# Altium PCB PCB_V1.PcbDoc (part 1 of 3)
Units mil, origin at the board's own origin, x right, y up, seen from the top; angles counter-clockwise.
Board outline 2382 x 2362.37 mil, 4 copper layers (L1, L2, L3, L4), stack 59.054 mil thick; 159 components, 117 nets, 497 pads, 313 vias.
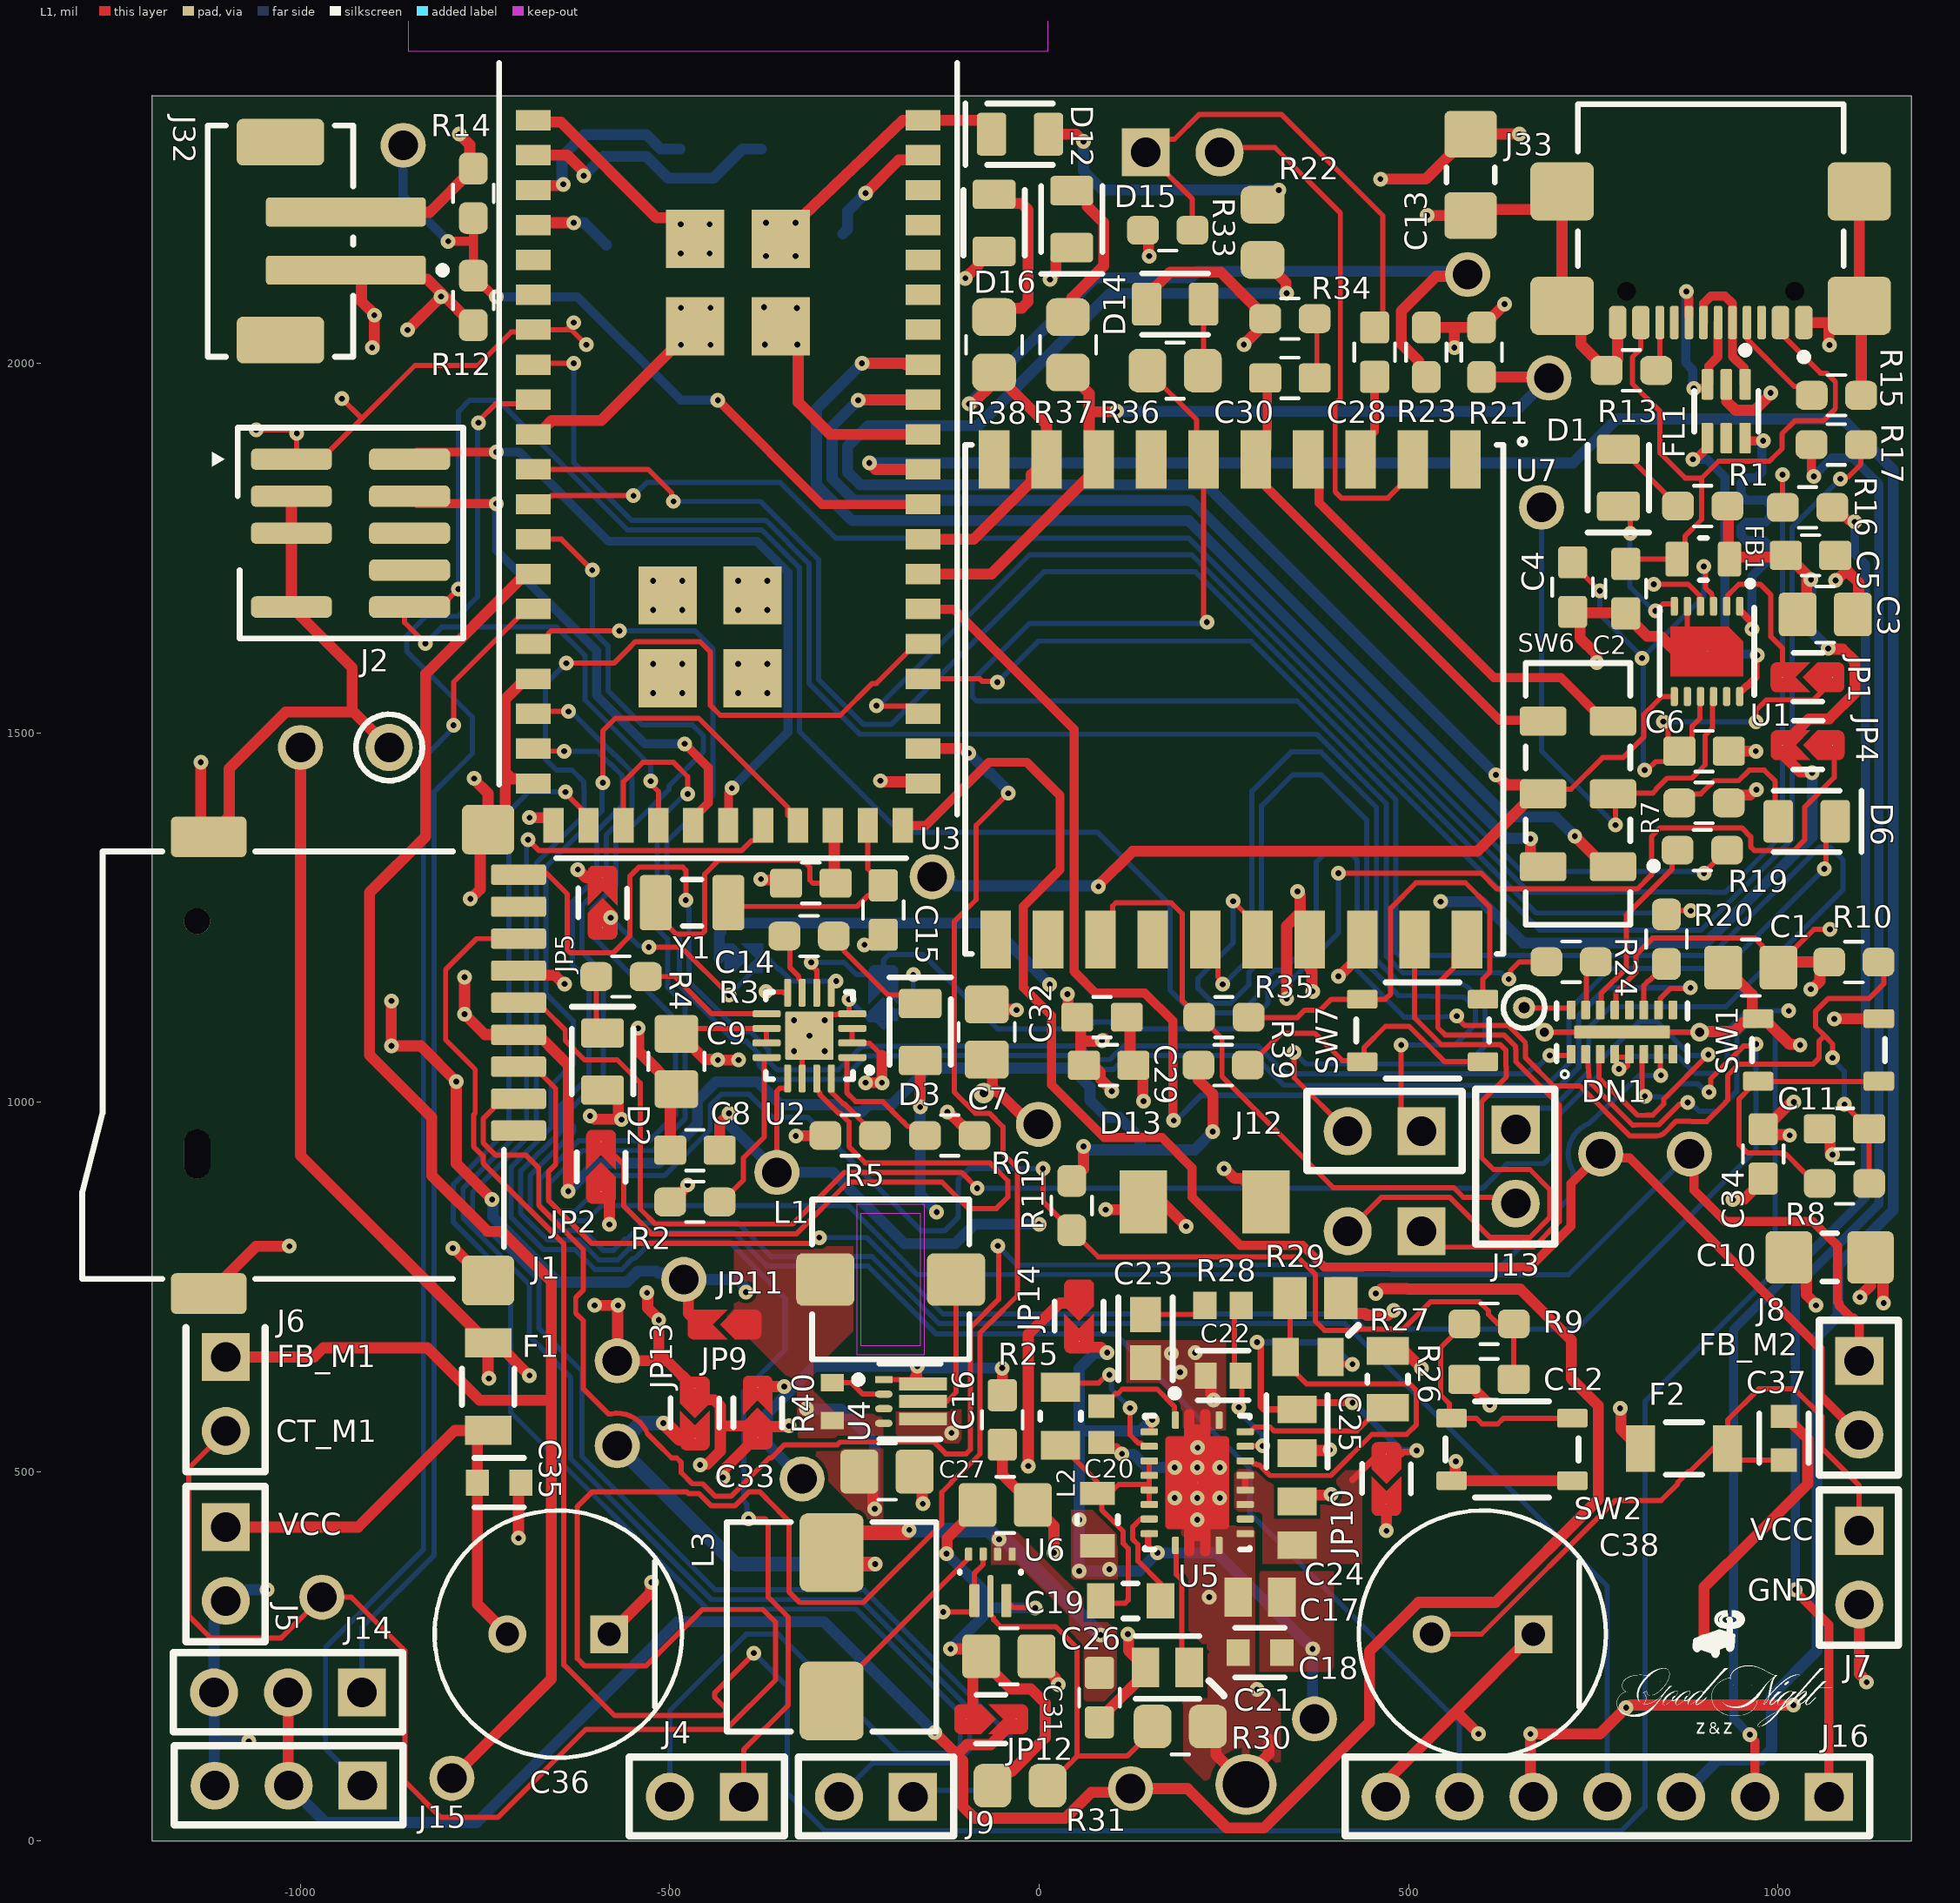
[diagram p0: L1 view]
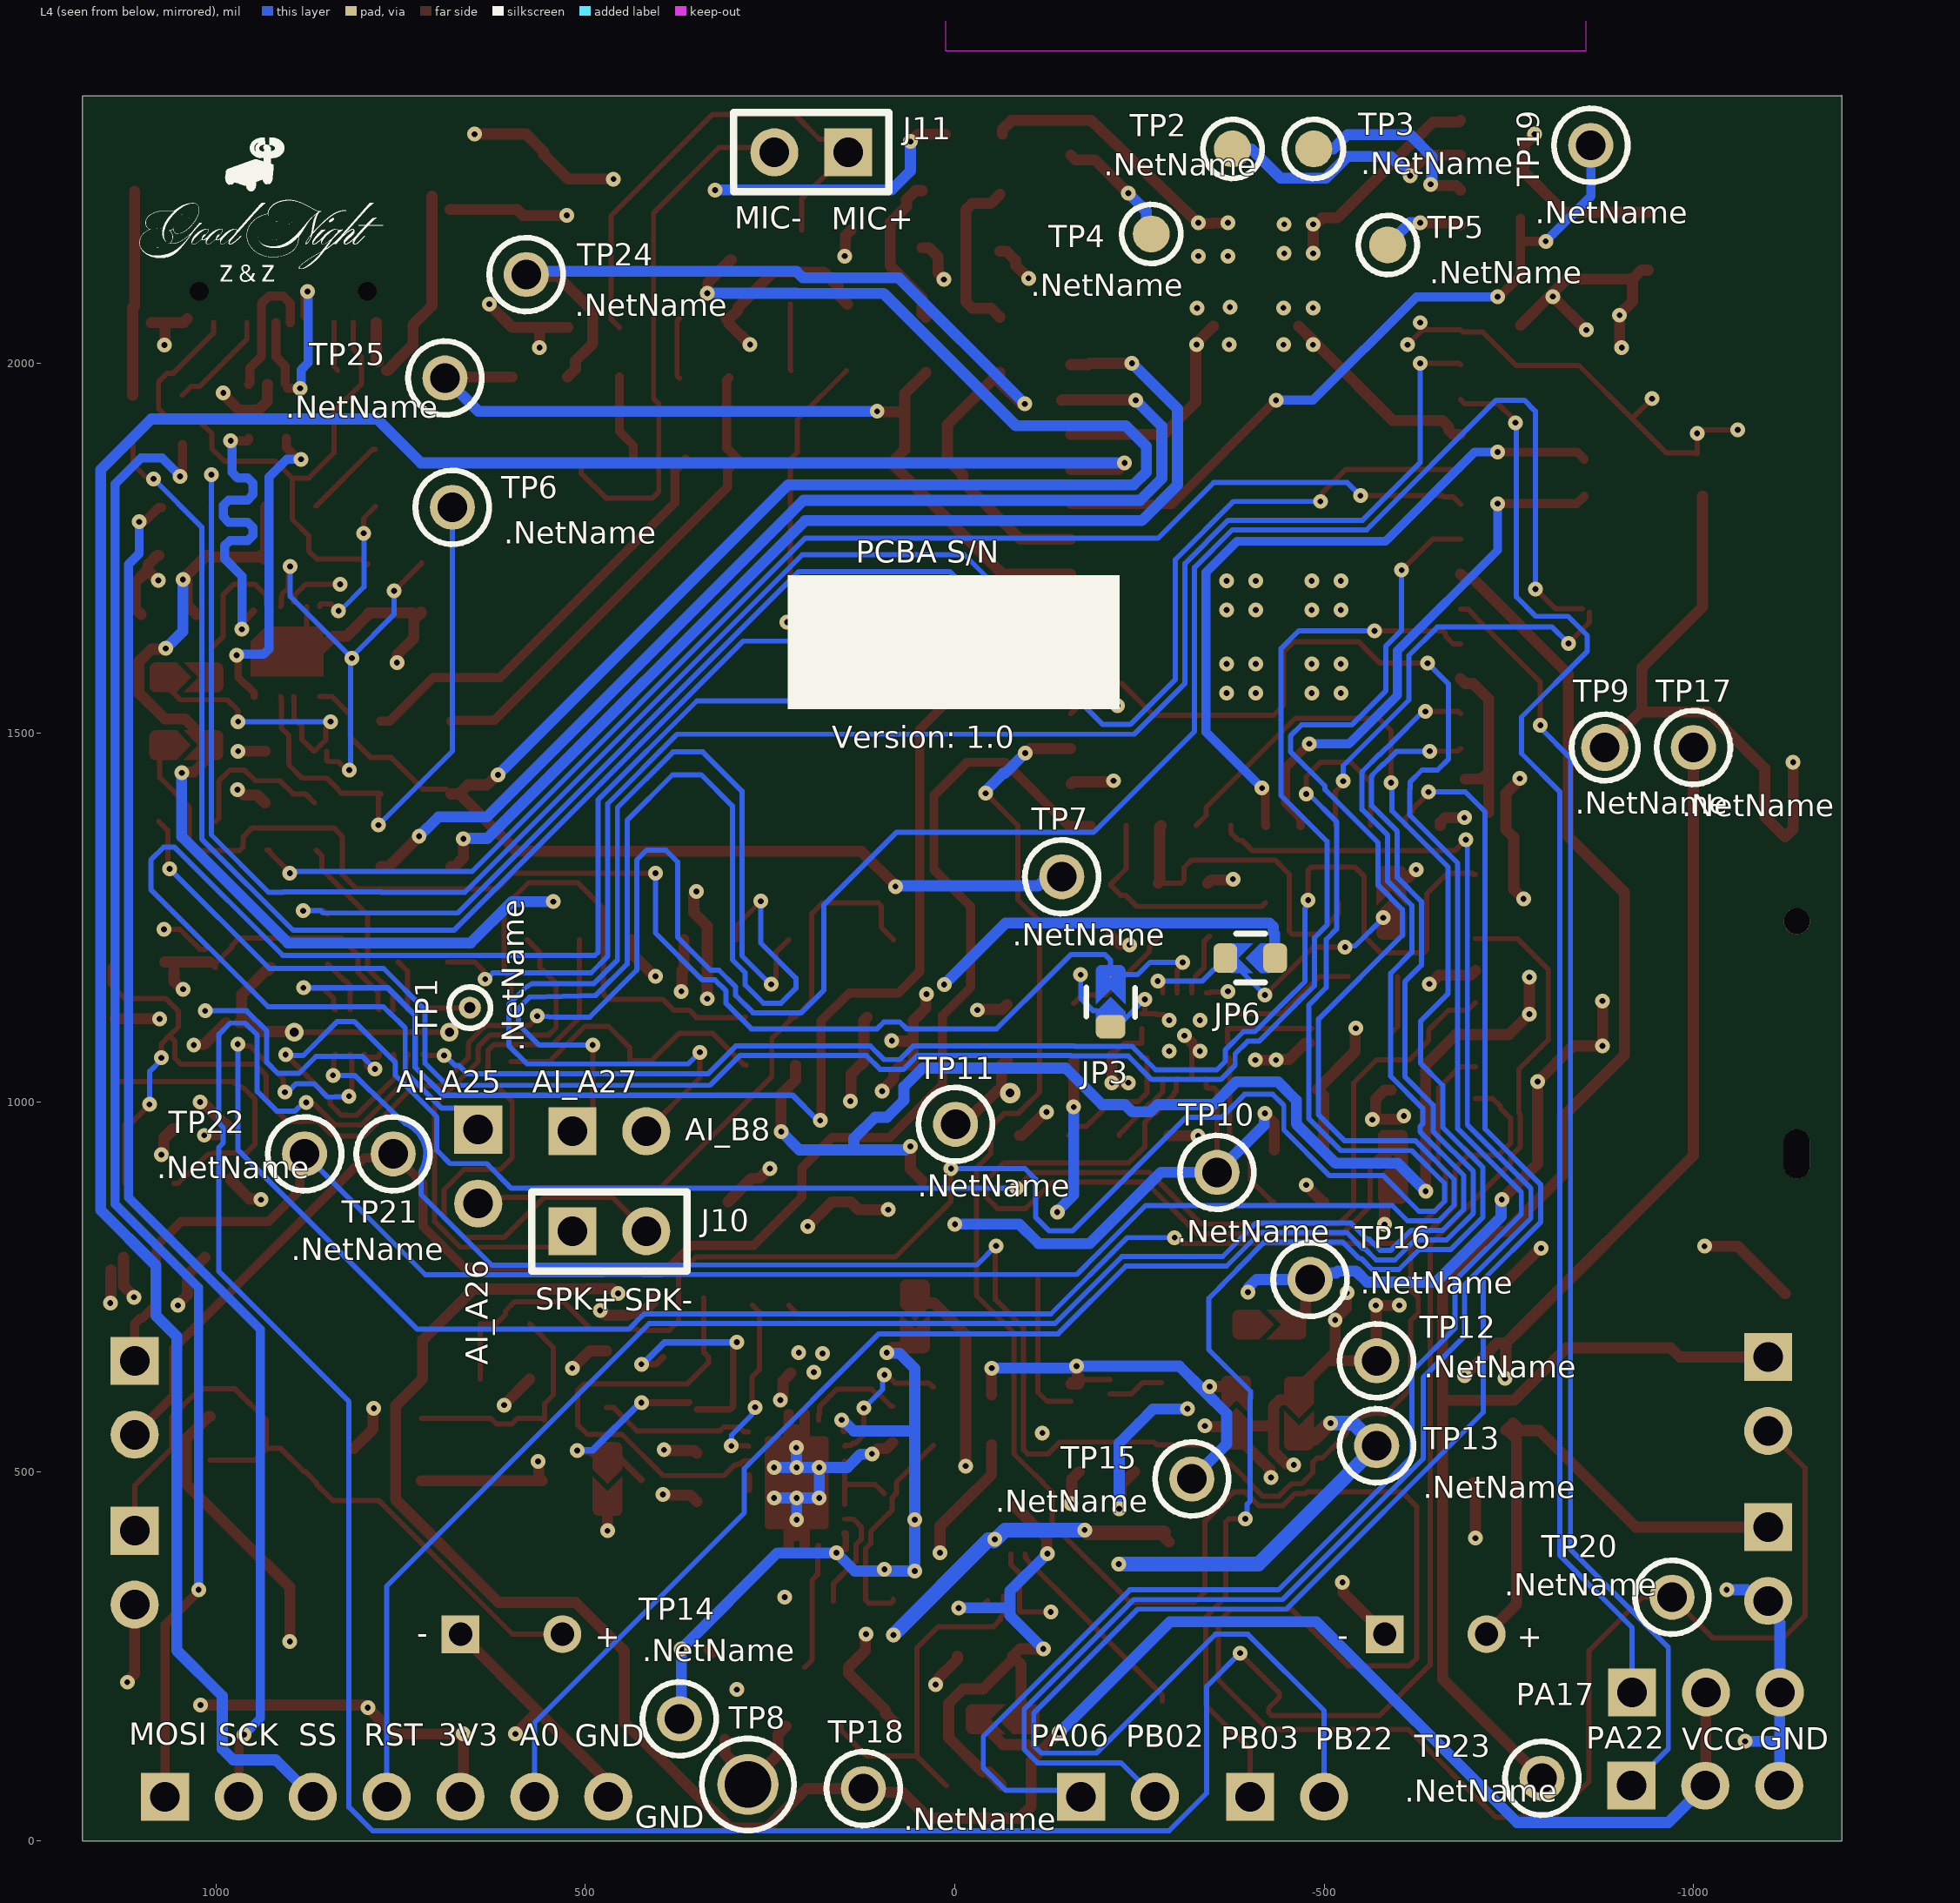
[diagram p1: L4 view, seen from below]
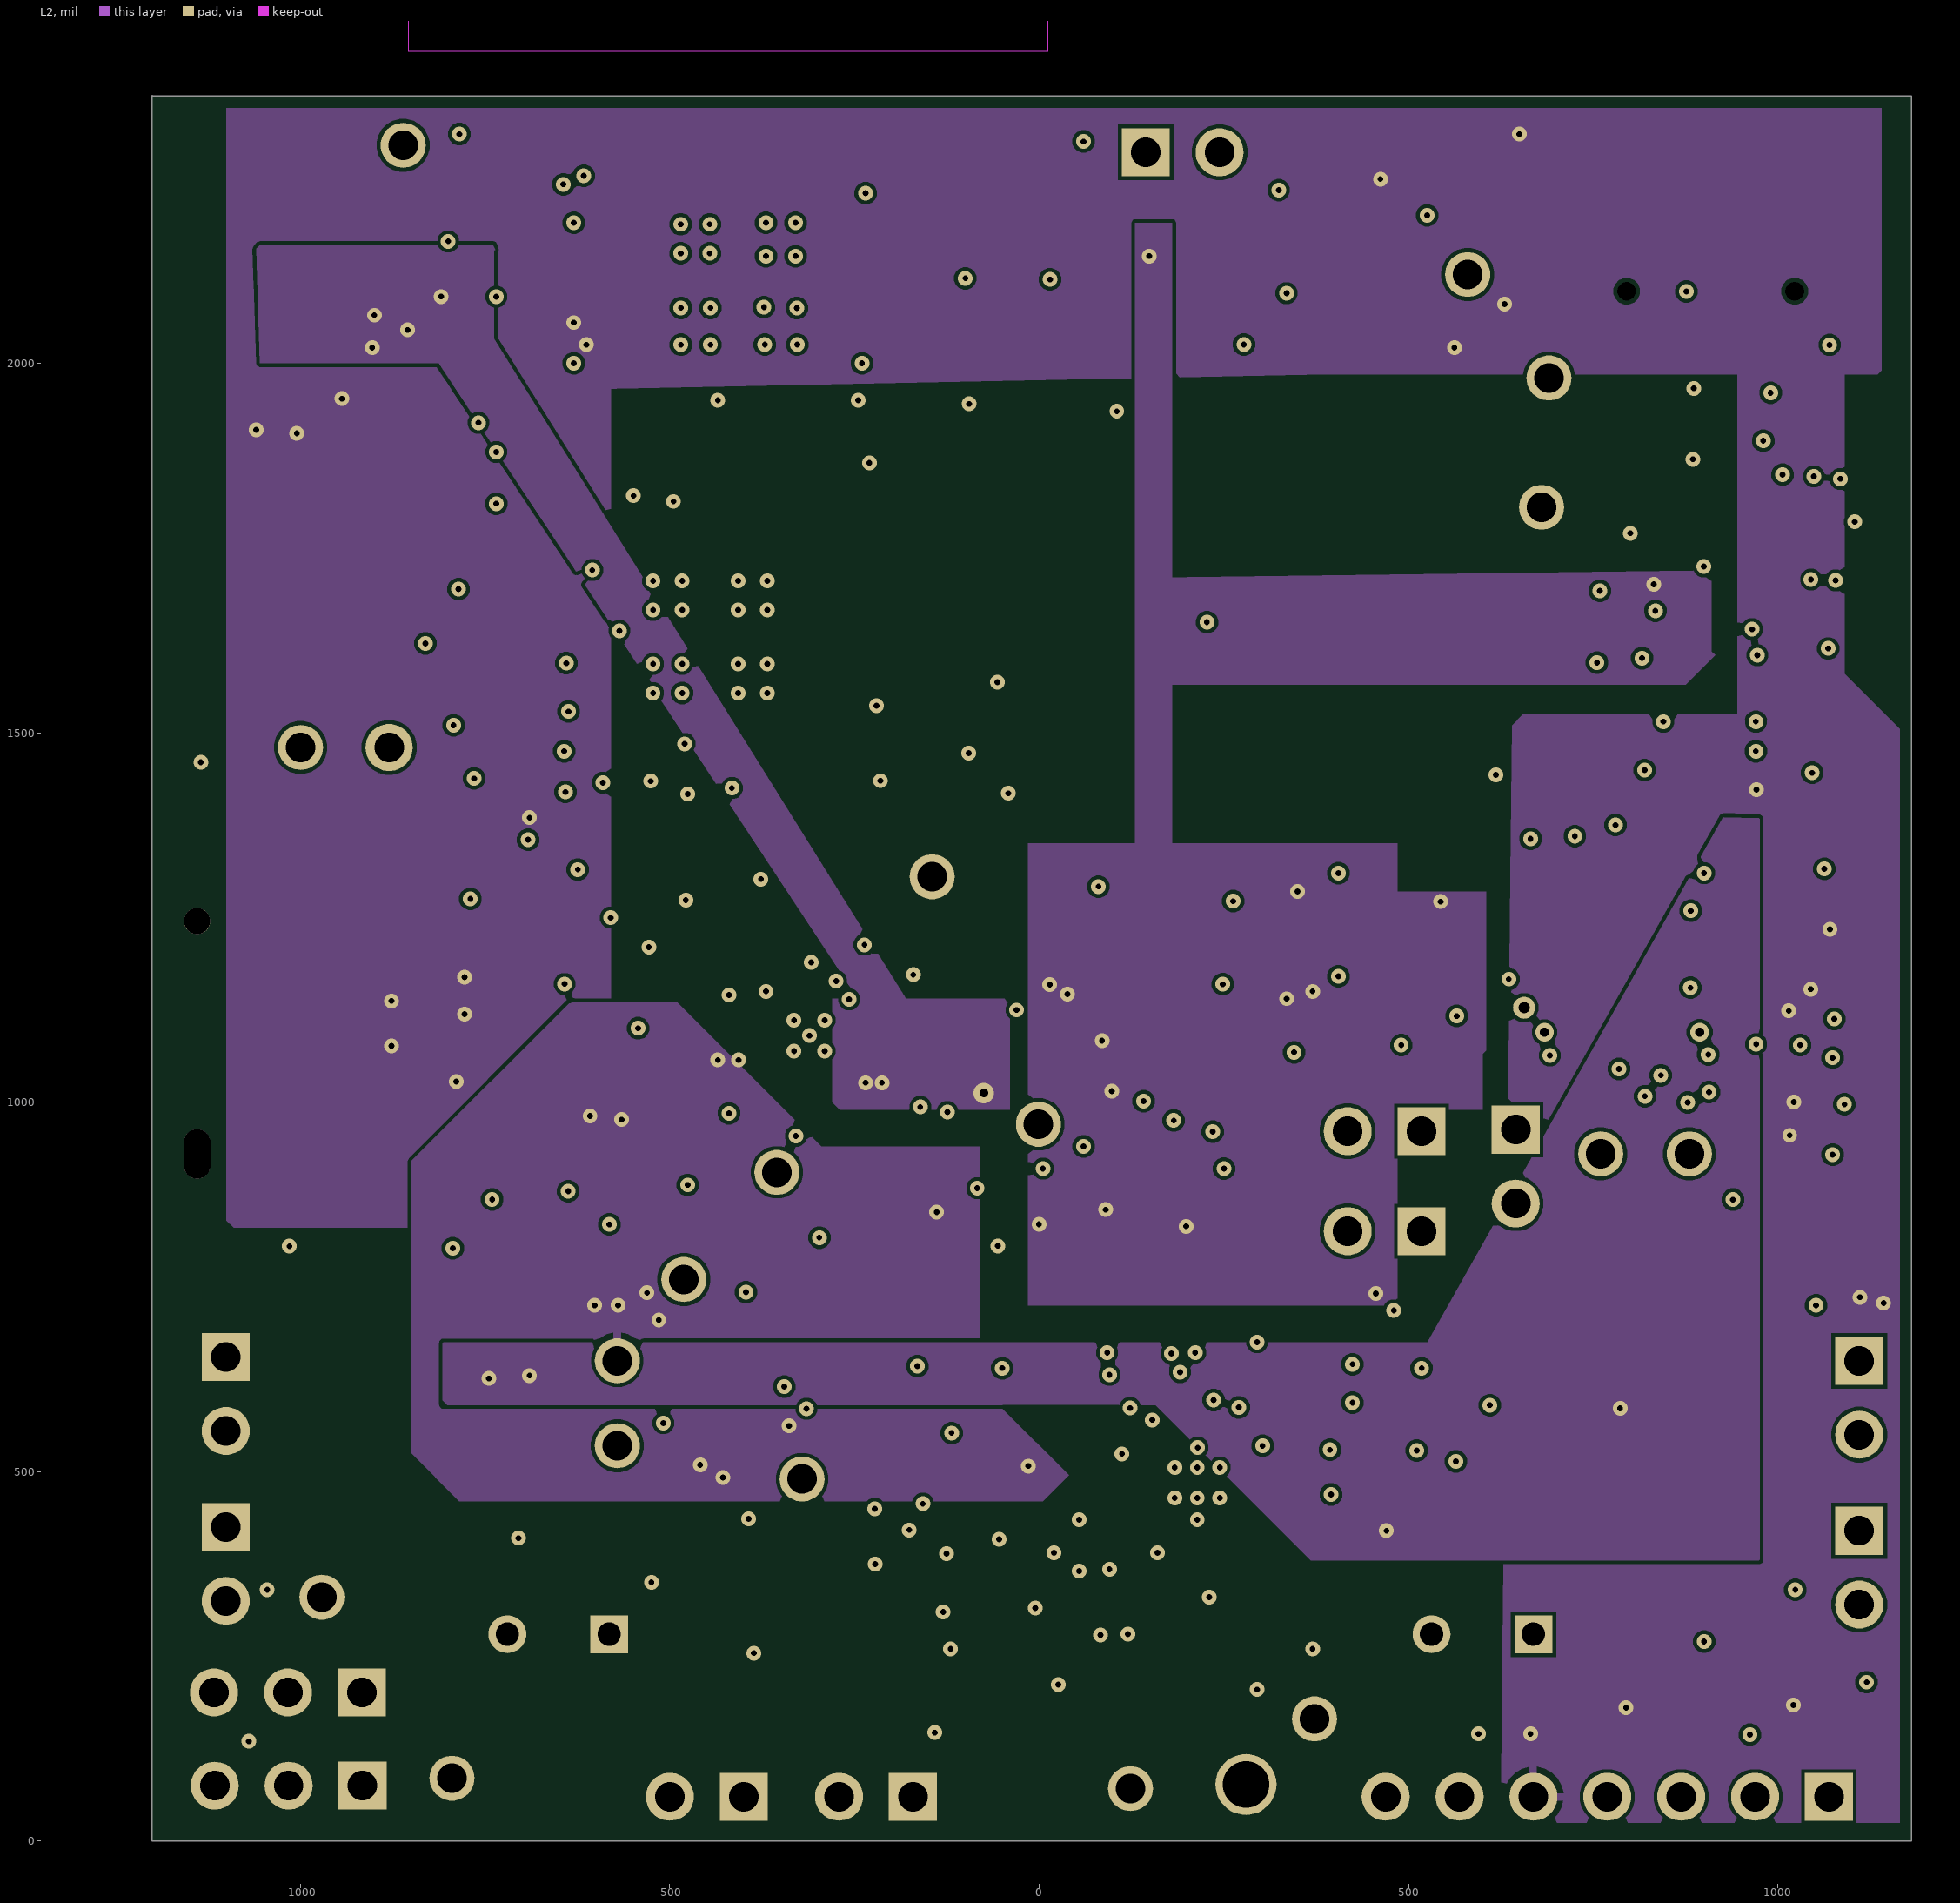
[diagram p2: L2]
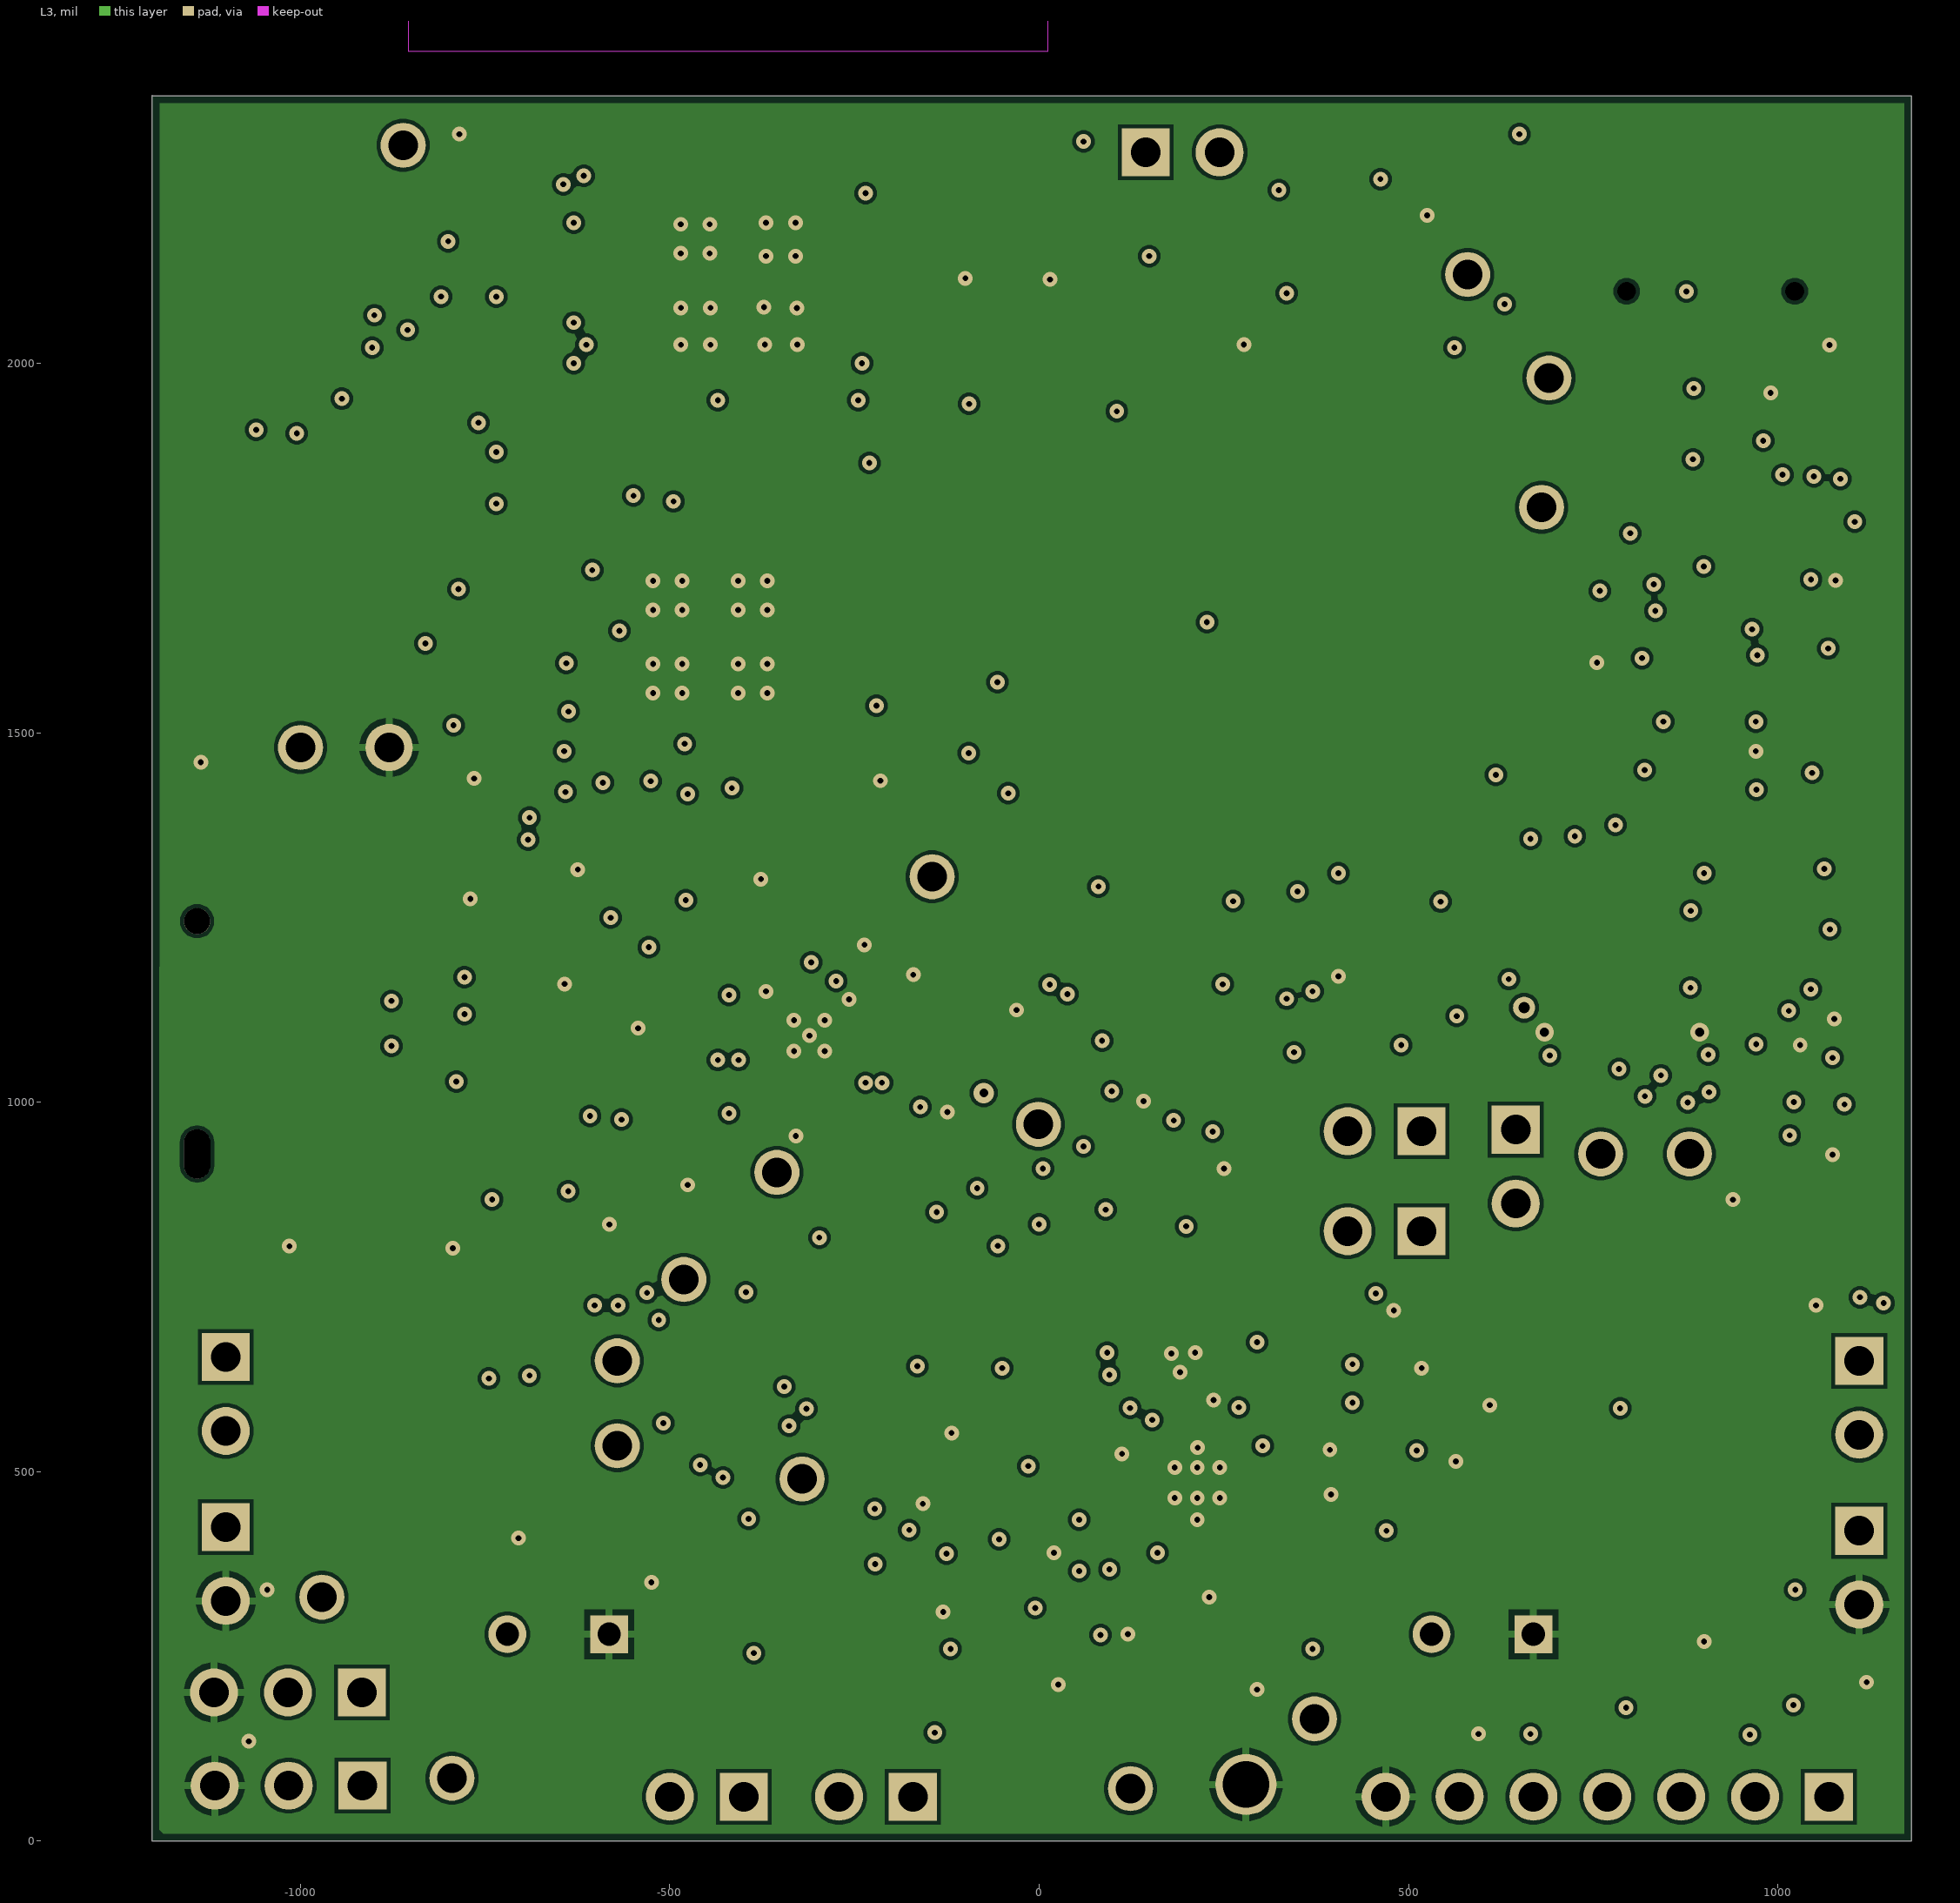
[diagram p3: L3]

## Layer stack, top to bottom
Top Solder: solder mask 1, PSR-4000BN DI Colors, Dk 3.9
L1: signal copper 1.378
Dielectric 1: core 7.96, FR408HR 2113, Dk 3.61
L2: signal copper 0.689
Core: dielectric 39, FR408HR, Dk 3.61
L3: signal copper 0.689
Dielectric 2: core 7.96, FR408HR 2113, Dk 3.61
L4: signal copper 1.378
Board Layer Stack Bottom Solder: solder mask 1, PSR-4000BN DI Colors, Dk 3.9

## Board outline
-1201,0 -1201,2362.37 -1200.63,2362 1181,2362 1181,0

## Design rules (kind name [scope] priority, off if disabled: settings)
AcuteAngle [All] p1: minimum=6.00000000000000E+0001 checktracksonly=TRUE
AssemblyTestPointUsage [All] p1 off: allowmultiple=TRUE
AssemblyTestpoint [All] p1 off: testpointundercomponent=TRUE minsize=30 maxsize=100 preferedsize=60 minholesize=0 maxholesize=40 preferedholesize=32 testpointgrid=1 usegrid=FALSE gridtolerance=0.01 allowsidebottom=TRUE
BoardOutlineClearance BoardOutlineClearance_Silk [(OnLayer('Top Overlay') OR OnLayer('Bottom Overlay'))] p1: gap=0 ignorepadtopadclearanceinfootprint=FALSE
BoardOutlineClearance "BoardOutlineClearance_Inner Layer" [OnLayer('GroundPlane')OR OnLayer('PowerPlane')] p2: gap=20 ignorepadtopadclearanceinfootprint=FALSE except(19: SMDPad-OutlineEdge SMDPad-CavityEdge SMDPad-CutoutEdge SMDPad-SplitBarrior SMDPad-SplitContinuation)
BoardOutlineClearance BoardOutlineClearance_OuterLayers [All] p3: gap=10 ignorepadtopadclearanceinfootprint=FALSE except(19: SMDPad-OutlineEdge SMDPad-CavityEdge SMDPad-CutoutEdge; 20: THPad-OutlineEdge THPad-CavityEdge THPad-CutoutEdge)
Clearance Clearance_USB [InComponent('J3')] p1: gap=5 ignorepadtopadclearanceinfootprint=TRUE
Clearance [All] p2: gap=5 ignorepadtopadclearanceinfootprint=TRUE except(6: Arc-Arc Arc-Track Track-Track SMDPad-SMDPad; 7: Arc-SMDPad Track-SMDPad; 9: SMDPad-Via; 10: Arc-THPad Arc-Via Track-THPad Track-Via SMDPad-THPad THPad-Via THPad-Hole Via-Via Via-Hole; 15: SMDPad-Hole; 18: Arc-Hole Track-Hole THPad-THPad)
DiffPairsRouting "USB DiffPairsRouting" [InDifferentialPairClass('USB')] p1: maxlimit=10 minlimit=5 mostfreqgap=10 toplayer_maxgap=5 toplayer_prefgap=5 toplayer_minwidth=10 toplayer_maxwidth=12.33 toplayer_prefwidth=12.33 bottomlayer_maxgap=5 bottomlayer_prefgap=5 bottomlayer_minwidth=10 bottomlayer_maxwidth=12.33 bottomlayer_prefwidth=12.33 impedanceprofiledriven=TRUE impedanceprofileid={16D9145D-771F-4F64-BD6F-50C53A652D04} impedanceprofilevalue=90.000000 maxuncoupledlength=500
FabricationTestPointUsage [All] p1 off: valid=0 allowmultiple=TRUE
FabricationTestpoint [All] p1 off: side=2 testpointundercomponent=TRUE minsize=30 maxsize=100 preferedsize=60 minholesize=0 maxholesize=40 preferedholesize=32 testpointgrid=1 allowsidebottom=TRUE usegrid=FALSE gridtolerance=0.01
Height [All] p1: minheight=0 maxheight=5000 prefheight=500
HoleSize [All] p1: absolutevalues=TRUE maxlimit=150 minlimit=7.87 maxpercent=80.000 minpercent=20.000
MinimumAnnularRing [All] p1: minimumring=5.91
MinimumSolderMaskSliver [All] p1: minsoldermaskwidth=0
PermittedLayers PermittedLayersTHT [IsThruComponent] p1: toplayerpermitted=TRUE bottomlayerpermitted=TRUE
PermittedLayers PermittedLayersSMT [IsSMTComponent] p2: toplayerpermitted=TRUE bottomlayerpermitted=TRUE
PlaneClearance [All] p1: clearance=10
PlaneConnect [All] p1: pad.planeconnectstyle=Relief pad.reliefexpansion=20 pad.reliefentries=4 pad.reliefconductorwidth=7 pad.reliefairgap=10 via.planeconnectstyle=Direct via.reliefexpansion=20 via.reliefentries=4 via.reliefconductorwidth=10 via.reliefairgap=10
PolygonConnect [All] p1: thpad.connectstyle=Relief thpad.reliefconductorwidth=10 thpad.reliefentries=4 thpad.polygonreliefangle="90 Angle" thpad.airgapwidth=8 smdpad.connectstyle=Direct smdpad.reliefconductorwidth=10 smdpad.reliefentries=4 smdpad.polygonreliefangle="90 Angle" smdpad.airgapwidth=8 via.connectstyle=Direct via.reliefconductorwidth=10 via.reliefentries=4 via.polygonreliefangle="90 Angle" via.airgapwidth=8
RoutingLayers [All] p1: top layer_v5=TRUE mid layer 1_v5=FALSE mid layer 2_v5=FALSE bottom layer_v5=TRUE
RoutingVias [All] p1: holewidth=8 width=20 viastyle="Through Hole" minholewidth=8 minwidth=20 maxholewidth=8 maxwidth=20
SMDNeckDown [All] p1: percent=105.000
SMDToCorner [All] p1: distance=0
SMDToPlane [All] p1: distance=0
SilkToSilkClearance SilkTextToSilk [IsText AND OnSilkscreen] p1: silktosilkclearance=5
SilkToSilkClearance [All] p2: silktosilkclearance=0
SilkToSolderMaskClearance [IsPad] p1: minsilkscreentomaskgap=2 clearancetoexposedcopper=TRUE
SolderMaskExpansion "Tent Vias" [IsVia] p1: expansion=4 istentingtop=TRUE
SolderMaskExpansion [All] p2: expansion=2 istentingtop=FALSE
SupplyNets "Schematic Supply Nets_8" [InNet('6V')] p1: voltage=0.000
SupplyNets "Schematic Supply Nets_7" [InNet('5V')] p2: voltage=0.000
SupplyNets "Schematic Supply Nets_6" [InNet('3V3')] p3: voltage=0.000
SupplyNets "Schematic Supply Nets_4" [InNet('VCCIO')] p4: voltage=0.000
SupplyNets "Schematic Supply Nets_3" [InNet('Vsystem')] p5: voltage=0.000
SupplyNets "Schematic Supply Nets_2" [InNet('VBAT')] p6: voltage=0.000
SupplyNets "Schematic Supply Nets_1" [InNet('VBUS')] p7: voltage=0.000
SupplyNets "Schematic Supply Nets" [InNet('GND')] p8: voltage=0.000
UnRoutedNet [All] p1: checkbadconnections=TRUE
ViasUnderSMD [All] p1: allowed=TRUE
Width "RF 50" [InNetClass('S50')] p1: maxlimit=16.7 minlimit=10 preferedwidth=16.7 toplayer_minwidth=16.7 bottomlayer_minwidth=16.7 impedanceprofiledriven=TRUE impedanceprofileid={F32E5A38-95BB-434A-B022-E87D3B55EC5B} impedanceprofilevalue=50.000000 minimp=50.000000 maximp=50.000000 favimp=50.000000
Width "Power Width" [InNetClass('Power')] p2: maxlimit=400 minlimit=7 preferedwidth=15
Width [All] p3: maxlimit=50 minlimit=7 preferedwidth=7
16 further rules are at their usual default settings.

## Classes and differential pairs
component class OLED_Connector: J16
component class Motors: C35 C36 C37 C38 F1 F2 J5 J6 J7 J8
component class LED_Strip: J14 J15
component class BUCK_3V3: C16 C33 L1 R40 U4
component class BOOST_6V: C17 C18 C19 C20 C21 C22 C23 C24 C25 L2 R25 R26 R27 R28 R29 U5
component class BOOST_5V: C26 C27 C31 L3 R30 R31 U6
component class "AI Audio Module": C28 C29 C30 C32 C34 D13 D14 D15 D16 J10 J11 J12 J13 R33 R34 R35 R36 R37 R38 R39 SW7 U7
differential pair class USB: USB_1 USB_DATA USB_FTDI_DATA_3
component class U_SerialToUSB: C2 C3 C4 C5 C6 D1 FB1 FL1 JP1 R1 U1
component class U_Memory: C1 DN1 J1 TP1
component class U_MCU: C10 C11 C12 C13 C14 C15 D6 J2 J4 J9 R7 R8 R9 R10 R11 SW1 SW2 TP2 TP3 TP4 TP5 U3 Y1
component class U_BatteryCharger: C7 C8 C9 D2 D3 JP2 JP3 JP4 JP5 JP6 R2 R3 R4 R5 R6 U2
component class "Top Level": D12 J32 J33 JP9 JP10 JP11 JP12 JP13 JP14 R12 R13 R14 R15 R16 R17 R19 R20 R21 R22 R23 R24 SW6 TP6 TP7 TP8 TP9 TP10 TP11 TP12 TP13 TP14 TP15 TP16 TP17 TP18 TP19 TP20 TP21 TP22 TP23 TP24 TP25
net class Power: 5V VBAT Vsystem
net class USB: D_N D_P USB_1_N USB_1_P USB_FTDI_DATA_3_N USB_FTDI_DATA_3_P
differential pair USB_1: +USB_1_P -USB_1_N
differential pair USB_FTDI_DATA_3: +USB_FTDI_DATA_3_P -USB_FTDI_DATA_3_N

## Components (designator, comment, footprint, x,y, rotation, side; value= is the part's Value field where it differs from the comment)
C1 "CAP 0805 4.7UF 50V 10% X5R" 0805_CAP 963.24,1181.96 r0 top value=4.7µF
C2 "CAP 0603 0.01UF 50V 10% X7R" 0603_CAP 794,1695 r90 top value=0.01UF
C3 "CAP 0805 4.7UF 10V 10% X7R" 0805_CAP 1063.93,1660 r180 top value=4.7UF
C4 "CAP 0603 0.1UF 50V 10% X7R" 0603_CAP 722,1697 r90 top value=100nF
C5 "CAP 0603 0.1UF 50V 10% X7R" 0603_CAP 1044,1740 r180 top value=100nF
C6 "CAP 0603 0.1UF 50V 10% X7R" 0603_CAP 900,1475 r180 top value=100nF
C7 "CAP 0805 4.7UF 50V 10% X5R" 0805_CAP -71.07,1095 r270 top value=4.7µF
C8 "CAP 0603 1UF 50V 10% X7R" 0603_CAP -466.07,935 r0 top value=1µF
C9 "CAP 0805 4.7UF 50V 10% X5R" 0805_CAP -491.07,1055 r90 top value=4.7µF
C10 "CAP 1206 10UF 50V 10% X5R" 1206_CAP 1070,790 r0 top value=10µF
C11 "CAP 0603 1UF 50V 10% X7R" 0603_CAP 1090,964 r0 top value=1µF
C12 "CAP 0603 1UF 50V 10% X7R" 0603_CAP 608.93,625 r0 top value=1µF
C13 "CAP 1206 10UF 50V 10% X5R" 1206_CAP 583.93,2255 r90 top value=10µF
C14 "CAP 0603 18PF 50V 5% C0G" 0603_CAP -309.16,1296.37 r0 top value=18PF
C15 "CAP 0603 18PF 50V 5% C0G" 0603_CAP -211.07,1260 r90 top value=18PF
C16 "CAP 0603 10UF 16V 20% X5R" 0603_CAP -50,570 r90 top value=10UF
C17 "47uF" FP-C0805C476M9PACTU-MFG 298.93,330 r180 top
C18 "100nF" FP-CC0603-DA-MFG 298.93,255 r180 top value="100 nF"
C19 "100nF" FP-CGA3E-0_3-0_1-IPC_A 123.58,325 r0 top
C20 "1uF" CAPC1608X87X35LL15T15 84,564 r270 top
C21 "8.2nF" FP-C0805C-DN-MFG 173.46,235 r180 top value="8,200 pF"
C22 "43pF" FP-C0603C-CF-MFG 248.93,630 r180 top value="43 pF"
C23 "1nF" FP-0603-L_1_6_0_15-W_0_81-IPC_A 143.93,680 r270 top
C24 "47uF" FP-C0805C476M9PACTU-MFG 348.93,430 r90 top
C25 "47uF" FP-C0805C476M9PACTU-MFG 348.93,554.53 r270 top
C26 "CAP 0603 10UF 16V 20% X5R" 0603_CAP 81.51,194.13 r90 top value=10UF
C27 "CAP 0805 22UF 10V 20% X5R" 0805_CAP_60H -46.07,455 r180 top value=22uF
C28 "CAP 0603 1UF 50V 10% X7R" 0603_CAP 453.93,2015 r90 top value=1µF
C29 "CAP 0603 10UF 16V 20% X5R" 0603_CAP 93.93,1050 r180 top value=10UF
C30 "CAP 0603 1UF 50V 10% X7R" 0603_CAP 339.38,1980 r180 top value=1µF
C31 "CAP 0805 22UF 10V 20% X5R" 0805_CAP_60H -41.07,250 r180 top value=22uF
C32 "CAP 0603 0.1UF 50V 10% X7R" 0603_CAP 85,1115 r180 top value=100nF
C33 "CAP 0805 22UF 10V 20% X5R" 0805_CAP_60H -206.07,500 r180 top value=22uF
C34 "CAP 0603 1UF 50V 10% X7R" 0603_CAP 980,930 r90 top value=1µF
C35 "100nF" FP-CC0603-DA-MFG -731.07,485 r0 top value="100 nF"
C36 "100uF" FP-RAD-TH-D_8_0_5-L_11_5-MFG -651.07,280 r180 top
C37 "100nF" FP-CC0603-DA-MFG 1007.98,545.09 r90 top value="100 nF"
C38 "100uF" FP-RAD-TH-D_8_0_5-L_11_5-MFG 600,280 r180 top
D1 "LSM0805412V" LED_0805_RED 783.93,1845 r90 top
D2 "LSM0805412V" LED_0805_RED -591.07,1055 r270 top
D3 "LSM0805452V" LED_0805 -161.07,1095 r270 top
D6 "LSM0805452V" LED_0805 1038.93,1380 r180 top
D12 "LSM0805452V" LED_0805 -26.07,2310 r0 top
D13 "SMBJ5.0CA-TR" FP-SMB-CA-MFG 223.93,865 r180 top
D14 "LSM0805543V" LED_0805_WHITE 183.93,2080 r0 top
D15 "LSM0805463V" LED_0805_BLUE 43.93,2195 r90 top
D16 "LSM0805472V" LED_0805_YELLOW -61.07,2190 r90 top
DN1 "ECLAMP2410PQTCT" ECLAMP2410PQTCT-Footprint-1 788.94,1094.78 r90 top
F1 "MF-NSMF050-2" FP-MF-NSMF050-2-MFG -746.07,615 r270 top value=0.15-0.7Ω
F2 "MF-NSMF050-2" FP-MF-NSMF050-2-MFG 872.78,531.31 r180 top value=0.15-0.7Ω
FB1 "MPZ2012S601AT000" "FP-MPZ2012-MFG (0805)" 898.93,1735 r0 top
FL1 "USBUF02W6" SOT-363-6-ST 930,1935 r270 top
J1 "693071020811" 693071020811 -1010,1050 r270 top
J2 "ARM Cortex Debug" "FTSH-105-01-F-DV-007-K PLUGIN" -932.26,1770.09 r270 top
J4 "MHDR 1X2" PH1-02-UA -450,60 r180 top
J5 "MHDR 1X2" PH1-02-UA -1101.07,375 r270 top
J6 "MHDR 1X2" PH1-02-UA -1101.07,605 r270 top
J7 "MHDR 1X2" PH1-02-UA 1110,370 r270 top
J8 "MHDR 1X2" PH1-02-UA 1110,600 r270 top
J9 "MHDR 1X2" PH1-02-UA -221.07,60 r180 top
J10 "MHDR 1X2" PH1-02-UA 467.5,825.39 r180 bottom
J11 "MHDR 1X2" PH1-02-UA 194.08,2285.38 r0 bottom
J12 "MHDR 1X2" PH1-02-UA 467.5,960.58 r180 top
J13 "MHDR 1X2" PH1-02-UA 645,912.82 r270 top
J14 "MHDR 1X3" "PH1-03-UA WITH CONNECTOR" -1017.04,201.11 r180 top
J15 "MHDR 1X3" "PH1-03-UA WITH CONNECTOR" -1016.07,75 r180 top
J16 "MHDR 1X7" "MHDR 1X7-Footprint-1" 768.93,60 r180 top
J32 "B2B-PH-SM4-TBT(LF)(SN)" FP-B2B-PH-SM4-TBT_LF_SN-MFG -1027.17,2165.3 r90 top
J33 "USB4110-GF-A" FP-USB4110-GF-A-MFG 908.93,2200 r180 top
JP1 "0603 link" 0603_JP_RES 1040,1575 r0 top value=0.025
JP2 "0603 link" 0603_JP_RES -593.09,912.61 r270 top value=0.025
JP3 "0603 link (Open)" 0603_JP_Open#1 -211.07,1135.85 r270 bottom value=10000000000meg
JP4 "0603 link" 0603_JP_RES 1040.09,1483.12 r0 top value=0.025
JP5 "0603 link" 0603_JP_RES -591.07,1270 r270 top value=0.025
JP6 "0603 link (Open)" 0603_JP_Open#2 -400,1195 r180 bottom value=10000000000meg
JP9 "0603 link" 0603_JP_RES -381.07,580 r270 top value=0.025
JP10 "0603 link" 0603_JP_RES 470,490 r90 top value=0.025
JP11 "0603 link" 0603_JP_RES -426,699 r0 top value=0.025
JP12 "0603 link" 0603_JP_RES -65,165 r180 top value=0.025
JP13 "0603 link" 0603_JP_RES -466.07,578.75 r90 top value=0.025
JP14 "0603 link" 0603_JP_RES 53.93,710 r90 top value=0.025
L1 "744373360047" WE-LHMI_5030 -201.07,760 r180 top value=470nH
L2 "1uH" FP-LQW21HN_00-MFG 78.93,435 r90 top
L3 "744311100" WE-HCI_7040 -281.07,290 r180 top value=1µH
R1 "RES 0603 1K 1%" 0603_RES 898.15,1806.63 r0 top value=1k
R2 "RES 0603 1.13K 1%" 0603_RES -466.07,865 r0 top value=1.13k
R3 "RES 0603 1K 1%" 0603_RES -311.51,1224.8 r0 top value=1k
R4 "RES 0603 1K 1%" 0603_RES -566.07,1170 r180 top value=1k
R5 "RES 0603 1.13K 1%" 0603_RES -256.07,955 r180 top value=1.13k
R6 "RES 0603 1K 1%" 0603_RES -121.07,955 r180 top value=1k
R7 "RES 0603 1K 1%" 0603_RES 900,1405 r180 top value=1k
R8 "RES 0603 100 1%" 0603_RES 1090,890 r0 top value=100
R9 "RES 0603 100 1%" 0603_RES 608.93,700 r0 top value=100
R10 "RES 0603 10K 1%" 0603_RES 1102.74,1189.63 r180 top value=10000
R11 "RES 0603 10K 1%" 0603_RES 43.93,860 r90 top value=10000
R12 "RES 0603 12K 5%" 0603_RES -766.07,2085 r90 top value=12k
R13 "RES 0603 5.1K 1%" 0603_RES 801.61,1990.27 r0 top value=5.1k
R14 "RES 0603 10K 0.1%" 0603_RES -766.07,2230 r90 top value=10k
R15 "RES 0603 5.1K 1%" 0603_RES 1079.14,1956.65 r180 top value=5.1k
R16 "RES 0603 0 5%" 0603_RES 1040,1805 r180 top value=0
R17 "RES 0603 0 5%" 0603_RES 1078.93,1890 r0 top value=0
R19 "RES 0603 0 5%" 0603_RES 897.6,1340.96 r180 top value=0
R20 "RES 0603 0 5%" 0603_RES 849,1220.54 r270 top value=0
R21 "RES 0603 4.7K 1%" 0603_RES 598.93,2015 r90 top value=4.7k
R22 "RES 0805 470 5%" 0805_RES 302.28,2177.24 r90 top value=470
R23 "RES 0603 4.7K 1%" 0603_RES 523.93,2015 r90 top value=4.7k
R24 "RES 0603 0 5%" 0603_RES 720,1190 r0 top value=0
R25 "267k" FP-RP732A-MFG 28.93,575 r90 top
R26 "127K" FP-CRCW0805-e3-MFG 471.59,625 r90 top
R27 "470k" FP-CRGCQ0805-IPC_C 363.93,655 r180 top value=470KΩ
R28 "28.7K" RESC1609X50X30NL10T20 248.93,725 r180 top
R29 "118k" RESC2013X70X40NL20T20 373.93,735 r0 top
R30 "RES 0805 100K 1%" 0805_RES 190.91,155.14 r180 top value=100k
R31 "RES 0805 732K 1%" 0805_RES -26.07,75 r180 top value=732k
R33 "RES 0603 2K 0.1%" 0603_RES 173.93,2180 r0 top value=2k
R34 "RES 0603 10K 0.1%" 0603_RES 339.38,2060.32 r0 top value=10k
R35 "RES 0603 0 5%" 0603_RES 250,1115 r0 top value=0
R36 "RES 0805 470 5%" 0805_RES 183.93,1990 r0 top value=470
R37 "RES 0805 470 5%" 0805_RES 38.93,2025 r90 top value=470
R38 "RES 0805 470 5%" 0805_RES -61.07,2025 r90 top value=470
R39 "RES 0603 100 1%" 0603_RES 248.93,1050 r180 top value=100
R40 "1MOhm" RESC1608X55X25LL10T15 -280,595 r270 top
SW1 "PTS810SJK250SMTRLFS" PTS810SJK250SMTRLFS-Footprint-1 1054.84,1070.66 r0 top
SW2 "PTS810SJK250SMTRLFS" PTS810SJK250SMTRLFS-Footprint-1 640,530 r180 top
SW6 "JS202011JCQN" FP-JS202011JCQN-MFG 729.32,1417.14 r90 top
SW7 "PTS810SJK250SMTRLFS" PTS810SJK250SMTRLFS-Footprint-1 518.99,1097.05 r0 top
TP1 "Testpad" "Test PTH 15-30" 656.32,1127.84 r90 bottom
TP2 "Testpad" "SMT Testpoint, 50mil"#1 -376.07,2290 r90 bottom
TP3 "Testpad" "SMT Testpoint, 50mil"#2 -486.07,2290 r90 bottom
TP4 "Testpad" "SMT Testpoint, 50mil"#1 -266.07,2175 r90 bottom
TP5 "Testpad" "SMT Testpoint, 50mil"#1 -586.07,2160 r90 bottom
TP6 "Testpad" "Keystone 5000 Series" 680,1805 r90 bottom
TP7 "Testpad" "Keystone 5000 Series" -145,1305 r90 bottom
TP8 "GND" KSTN-5011_V 279.78,76.54 r180 bottom
TP9 "Testpad" Testpad-HeaderPin -880,1480 r180 bottom
TP10 "Testpad" "Keystone 5000 Series" -355,905 r90 bottom
TP11 "Testpad" "Keystone 5000 Series" -1.07,970 r90 bottom
TP12 "Testpad" "Keystone 5000 Series" -571.07,650 r90 bottom
TP13 "Testpad" "Keystone 5000 Series" -571.07,535 r90 bottom
TP14 "Testpad" "Keystone 5000 Series" 372.58,165.37 r90 bottom
TP15 "Testpad" "Keystone 5000 Series" -321.07,490 r90 bottom
TP16 "Testpad" "Keystone 5000 Series" -481.07,760 r90 bottom
TP17 "Testpad" "Keystone 5000 Series" -1000,1480 r90 bottom
TP18 "Testpad" "Keystone 5000 Series" 123.58,71.06 r90 bottom
TP19 "Testpad" "Keystone 5000 Series" -861.07,2295 r90 bottom
TP20 "Testpad" "Keystone 5000 Series" -971.07,330 r90 bottom
TP21 "Testpad" "Keystone 5000 Series" 760,930 r90 bottom
TP22 "Testpad" "Keystone 5000 Series" 880,930 r90 bottom
TP23 "Testpad" "Keystone 5000 Series" -795,85 r270 bottom
TP24 "Testpad" "Keystone 5000 Series" 580,2120 r90 bottom
TP25 "Testpad" "Keystone 5000 Series" 690,1980 r90 bottom
U1 "FT234XD-R" FP-DFN-12-MFG 903.93,1610 r270 top
U2 "BQ24075RGTR" FP-RGT0016C-IPC_A -311.07,1090 r180 top
U3 "ATSAMW25H18-MR210" ATSAMW25H18-MR210-Footprint-1 -421.07,1880 r0 top
U4 "TPS62086RLTR" FP-RLT0007A-MFG -175,595 r0 top
U5 "TPS61088RHLT" FP-RHL0020A-MFG 213.93,485 r0 top
U6 "TPS61022RWUR" FP-RWU0007A-MFG -66.07,350 r90 top
U7 "vc-02" SON180P1700X265-20N 263.93,1545 r270 top
Y1 "ABS07-32.768KHZ-T" FP-ABS07-MFG -470,1270 r0 top

## Footprints (in the part's own frame and the unit in brackets; to place one, negate y for a bottom-side part, rotate by r counter-clockwise, add the part's x,y. Pads: shape width x height; smd on the part's side, far side on the other; paste and mask are expansions set on the pad)
0603_CAP [mm]
  rrect25% 1.1x1 smd: 1(-0.85,0) 2(0.85,0)
  silkscreen extent -0.3,-0.7 0.3,0.7, body extent -0.8,-0.4 0.8,0.4, height 0.6
0603_JP_Open#1 [mil] "Jumper (Open/DNP)"
  rrect50% 32x40 smd paste+0: 1(33.75,0)
  round 1 smd paste+0: 2(-33.75,0)
  L1 region: 26,20 13.75,20 -6.25,0 13.75,-20 26,-20
  L1 region: -26.25,0 -16.25,0 3.75,20 -26.25,20
  L1 region: -26.25,0 -16.25,0 3.75,-20 -25.75,-20
  L1 region: -17.75,-12 -17.75,12 -18.36,15.06 -20.09,17.66 -22.69,19.39 -25.75,20 -25.75,20 -41.75,20 -44.81,19.39 -47.41,17.66 -49.14,15.06 -49.75,12 -49.75,12 -49.75,-12 -49.14,-15.06 -47.41,-17.66 -44.81,-19.39 -41.75,-20 -41.75,-20 -25.75,-20 -22.69,-19.39 -20.09,-17.66 -18.36,-15.06 -17.75,-12
  silkscreen extent -19,-33 20,33
0603_JP_Open#2 [mil] "Jumper (Open/DNP)"
  rrect50% 32x40 smd paste+0: 1(33.75,0) 2(-33.75,0)
  L1 region: 26,20 13.75,20 -6.25,0 13.75,-20 26,-20
  L1 region: -26.25,0 -16.25,0 3.75,20 -26.25,20
  L1 region: -26.25,0 -16.25,0 3.75,-20 -25.75,-20
  silkscreen extent -19,-33 20,33
0603_JP_RES [mil] "Jumper (Resistor)"
  round 1 smd paste-99999: 1(33.75,0) 2(-33.75,0)
  L1 region: -49.75,-12 -49.14,-15.06 -47.41,-17.66 -44.81,-19.39 -41.75,-20 -41.75,-20 3.75,-20 -16.25,0 3.75,20 -41.75,20 -44.81,19.39 -47.41,17.66 -49.14,15.06 -49.75,12 -49.75,12
  L1 region: 41.75,-20 44.81,-19.39 47.41,-17.66 49.14,-15.06 49.75,-12 49.75,-12 49.75,12 49.14,15.06 47.41,17.66 44.81,19.39 41.75,20 41.75,20 13.75,20 -6.25,0 13.75,-20 26,-20
  silkscreen extent -19,-33 20,33, body extent -31,-16 31,16, height 24
0603_RES [mil]
  rrect50% 43x39 smd: 1(-33.46,0) 2(33.46,0)
  silkscreen extent -12,-28 12,27, body extent -31,-16 32,16, height 24
0805_CAP [mm]
  rrect25% 1.3x1.5 smd: 1(-0.95,0) 2(0.95,0)
  silkscreen extent -0.3,-0.97 0.3,0.97, body extent -1,-0.65 1,0.66, height 1.52
0805_CAP_60H [mm]
  rrect25% 1.3x1.5 smd: 1(-0.95,0) 2(0.95,0)
  silkscreen extent -0.3,-0.97 0.3,0.97, body extent -1,-0.65 1,0.66, height 1.52
0805_RES [mm]
  rrect50% 1.3x1.5 smd: 1(-0.95,0) 2(0.95,0)
  body extent -1.09,-0.7 1.09,0.7, height 1.1
1206_CAP [mm]
  rrect25% 1.6x1.8 smd: 1(-1.4,0) 2(1.4,0)
  silkscreen extent -0.25,-0.83 0.25,0.83, body extent -1.6,-0.83 1.6,0.83, height 1.91
693071020811 [mm] "Micro SD Card Connector Push & Push - with Card Detection - 8 Pins"
  rrect25% 0.7x1.9 smd: 1(2.25,7.75) 2(1.15,7.75) 3(0.05,7.75) 4(-1.05,7.75) 5(-2.15,7.75) 6(-3.25,7.75) 7(-4.35,7.75) 8(-5.45,7.75) 9(-6.55,7.75)
  round 0.9 hole 0.9 unplated: MH1(-4.95,-3.3)
  oval 1.7x0.9 hole 0.9 slot 1.7 at 0 deg unplated: MH2(3.05,-3.3)
  rrect25% 1.7x1.8 smd: S1(-8.1,6.7) S2(7.4,6.7)
  rrect25% 1.4x2.6 smd: S3(-7.85,-2.9) S4(7.85,-2.9)
  silkscreen extent -7.35,-7.25 7.35,7.25, body extent -8.2,-9.8 8.2,7.73, height 1.85
ATSAMW25H18-MR210-Footprint-1 [mm]
  rect 1.2x0.7 smd mask+0.05: 1(-6.696,11.4) 2(-6.696,10.2) 3(-6.696,9) 4(-6.696,7.8) 5(-6.696,6.6) 6(-6.696,5.4) 7(-6.696,4.2) 8(-6.696,3) 9(-6.696,1.8) 10(-6.696,0.6) 11(-6.696,-0.6) 12(-6.696,-1.8) 13(-6.696,-3) 14(-6.696,-4.2) 15(-6.696,-5.4) 16(-6.696,-6.6) 17(-6.696,-7.8) 18(-6.696,-9) 19(-6.696,-10.2) 20(-6.696,-11.4) 32(6.704,-11.4) 33(6.704,-10.2) 34(6.704,-9) 35(6.704,-7.8) 36(6.704,-6.6) 37(6.704,-5.4) 38(6.704,-4.2) 39(6.704,-3) 40(6.704,-1.8) 41(6.704,-0.6) 42(6.704,0.6) 43(6.704,1.8) 44(6.704,3) 45(6.704,4.2) 46(6.704,5.4) 47(6.704,6.6) 48(6.704,7.8) 49(6.704,9) 50(6.704,10.2) 51(6.704,11.4)
  rect 0.7x1.2 smd mask+0.05: 21(-6,-12.841) 22(-4.8,-12.841) 23(-3.6,-12.841) 24(-2.4,-12.841) 25(-1.2,-12.841) 26(0,-12.841) 27(1.2,-12.841) 28(2.4,-12.841) 29(3.6,-12.841) 30(4.8,-12.841) 31(6,-12.841)
  rect 2x2 smd mask+0.05: EP(-2.082,-7.786) EP(-2.082,-4.931) EP(-1.134,4.318) EP(-1.134,7.325) EP(0.842,-7.786) EP(0.842,-4.931) EP(1.805,4.32) EP(1.805,7.325)
  Keep-Out Layer region: -11,13.775 11,13.775 11,20.275 -11,20.275
  silkscreen extent -7.87,-13.97 7.87,13.37, body extent -7.45,-13.6 7.45,20.26, height 3.37
CAPC1608X87X35LL15T15 [mm] "Chip Capacitor, 2-Leads, Body 1.60x0.80mm, IPC High Density"
  rect 0.8x0.9 smd: 1(-0.625,0) 2(0.625,0)
  body extent -0.87,-0.48 0.87,0.48, height 0.87
ECLAMP2410PQTCT-Footprint-1 [mm]
  rrect20% 0.63x0.3 smd mask+0: 1(-0.76,1.75) 2(-0.76,1.25) 3(-0.76,0.75) 4(-0.76,0.25) 5(-0.76,-0.25) 6(-0.76,-0.75) 7(-0.76,-1.25) 8(-0.76,-1.75) 9(0.76,-1.75) 10(0.76,-1.25) 11(0.76,-0.75) 12(0.76,-0.25) 13(0.76,0.25) 14(0.76,0.75) 15(0.76,1.25) 16(0.76,1.75)
  rrect20% 0.45x3.3 smd mask+0: EP(0,0)
  L1 lines w0.2: 0,2.667 0,0 0,-2.667
  silkscreen extent -1.58,-2.25 1,2.25, body extent -0.85,-2.05 0.85,2.05, height 0.65
FP-0603-L_1_6_0_15-W_0_81-IPC_A [mil]
  rect 47.5x42.06 smd paste+0 mask+0: 1(-32.51,0) 2(32.51,0)
  silkscreen extent -56,-37 56,37, body extent -76,-41 76,41, height 10
FP-ABS07-MFG [mm]
  rrect25% 1.1x1.9 smd paste+0 mask+0: 1(-1.25,0) 2(1.25,0)
  silkscreen extent -0.33,-0.8 0.33,0.8, body extent -1.6,-0.75 1.6,0.75, height 0.9
FP-B2B-PH-SM4-TBT_LF_SN-MFG [mm]
  rrect25% 1x5.5 smd: 1(-1,-2.25) 2(1,-2.25)
  rrect25% 1.6x3 smd: S1(-3.4,0) S2(3.4,0)
  silkscreen extent -3.97,-5.7 3.97,2.5, body extent -3.98,-4.5 3.98,2.5, height 6.6
FP-C0603C-CF-MFG [mm]
  rect 0.75x0.9 smd paste+0 mask+0: 1(-0.6,0) 2(0.6,0)
  silkscreen extent -0.87,-0.85 0.88,0.85, body extent -1.2,-0.6 1.2,0.6, height 0.25
FP-C0805C476M9PACTU-MFG [mm]
  rect 0.95x1.35 smd paste+0 mask+0: 1(-0.75,0) 2(0.75,0)
  body extent -1.4,-0.85 1.4,0.85, height 0.25
FP-C0805C-DN-MFG [mm]
  rect 0.95x1.35 smd paste+0 mask+0: 1(-0.75,0) 2(0.75,0)
  silkscreen extent -1.1,-1.07 1.1,1.07, body extent -1.4,-0.85 1.4,0.85, height 0.25
FP-CC0603-DA-MFG [mm]
  rect 0.8x0.9 smd paste+0 mask+0: 1(-0.75,0) 2(0.75,0)
  silkscreen extent -0.85,-0.85 0.85,0.85, body extent -1.35,-0.75 1.35,0.75, height 0.25
FP-CGA3E-0_3-0_1-IPC_A [mm]
  rect 0.956x1.206 smd paste+0 mask+0: 1(-1.025,0) 2(1.025,0)
  silkscreen extent -0.25,-0.6 0.25,0.6, body extent -2,-1.1 2,1.1, height 0.25
FP-CRCW0805-e3-MFG [mm]
  rect 0.95x1.45 smd paste+0 mask+0: 1(-0.975,0) 2(0.975,0)
  silkscreen extent -0.13,-0.7 0.13,0.7, body extent -1.55,-0.82 1.55,0.82, height 0.25
FP-CRGCQ0805-IPC_C [mil]
  rect 35.67x51.57 smd paste+0 mask+0: 1(-30.55,0) 2(30.55,0)
  body extent -52,-31 52,31, height 10
FP-DFN-12-MFG [mm]
  rrect50% 0.65x0.25 smd paste-0.025 mask+0: 1(-1.55,1.125) 2(-1.55,0.675) 3(-1.55,0.225) 4(-1.55,-0.225) 5(-1.55,-0.675) 6(-1.55,-1.125) 7(1.55,-1.125) 8(1.55,-0.675) 9(1.55,-0.225) 10(1.55,0.225) 11(1.55,0.675) 12(1.55,1.125)
  round 0.025 smd paste-0.05 mask+0: 13(0,0)
  L1 region: 0.85,-1.25 -0.85,-1.25 -0.85,0.74 -0.34,1.25 0.85,1.25
  silkscreen extent -2.41,-1.62 1.5,1.62, body extent -1.5,-1.5 1.5,1.5, height 0.81
FP-JS202011JCQN-MFG [mm]
  rrect25% 1x1.6 smd paste+0: 1(-2.5,-1.2) 2(0,-1.2) 3(2.5,-1.2) 4(-2.5,1.2) 5(0,1.2) 6(2.5,1.2)
  silkscreen extent -4.5,-2.73 4.5,1.8, body extent -4.5,-1.8 4.5,1.8, height 5.6
FP-LQW21HN_00-MFG [mm]
  rect 0.8x1.2 smd paste+0 mask+0: 1(-0.9,0) 2(0.9,0)
  silkscreen extent -0.13,-0.7 0.13,0.7, body extent -1.4,-0.8 1.4,0.8, height 0.25
FP-MF-NSMF050-2-MFG [mm]
  rect 1x1.6 smd paste+0 mask+0: 1(-1.5,0) 2(1.5,0)
  silkscreen extent -0.62,-0.9 0.62,0.9, body extent -2.1,-1 2.1,1, height 0.25
"FP-MPZ2012-MFG (0805)" [mm]
  rrect25% 0.8x1.2 smd paste+0: 1(-0.9,0) 2(0.9,0)
  silkscreen extent -0.13,-0.73 0.13,0.73, body extent -1,-0.63 1,0.63, height 1.05
FP-RAD-TH-D_8_0_5-L_11_5-MFG [mm]
  rect 1.3x1.3 hole 0.8 paste-2539.97 mask+0: 1(-1.75,0)
  round 1.3 hole 0.8 paste-2539.97 mask+0: 2(1.75,0)
  silkscreen extent -4.25,-4.25 4.25,4.25, body extent -4.35,-4.35 4.35,4.35, height 0.25
FP-RGT0016C-IPC_A [mm]
  rrect50% 0.966x0.239 smd paste+0 mask+0: 1(-1.473,0.75) 2(-1.473,0.25) 3(-1.473,-0.25) 4(-1.473,-0.75) 9(1.473,-0.75) 10(1.473,-0.25) 11(1.473,0.25) 12(1.473,0.75)
  rrect50% 0.239x0.966 smd paste+0 mask+0: 5(-0.75,-1.473) 6(-0.25,-1.473) 7(0.25,-1.473) 8(0.75,-1.473) 13(0.75,1.473) 14(0.25,1.473) 15(-0.25,1.473) 16(-0.75,1.473)
  rrect6% 1.664x1.664 smd paste-1000 mask+0: EP(0,0)
  silkscreen extent -2.14,-1.5 1.5,1.5, body extent -2.46,-2.46 2.46,2.46, height 0.25
FP-RHL0020A-MFG [mm]
  rrect42% 0.24x0.6 smd paste+0 mask+0: 1(-0.75,2.15) 10(-0.75,-2.15) 11(0.75,-2.15) 20(0.75,2.15)
  rrect42% 0.6x0.24 smd paste+0 mask+0: 2(-1.65,1.75) 3(-1.65,1.25) 4(-1.65,0.75) 5(-1.65,0.25) 6(-1.65,-0.25) 7(-1.65,-0.75) 8(-1.65,-1.25) 9(-1.65,-1.75) 12(1.65,-1.75) 13(1.65,-1.25) 14(1.65,-0.75) 15(1.65,-0.25) 16(1.65,0.25) 17(1.65,0.75) 18(1.65,1.25) 19(1.65,1.75)
  round 0.025 smd paste-2539.97 mask-1000: EP(0,0)
  L1 region: -1.095,1.455 -1.076,1.525 -1.025,1.576 -0.955,1.595 -0.955,1.595 -0.445,1.595 -0.445,2.38 -0.426,2.45 -0.375,2.501 -0.305,2.52 -0.305,2.52 -0.245,2.52 -0.191,2.509 -0.146,2.479 -0.116,2.434 -0.105,2.38 -0.105,2.38 -0.105,1.995 0.105,1.995 0.105,2.38 0.124,2.45 0.175,2.501 0.245,2.52 0.245,2.52 0.305,2.52 0.375,2.501 0.426,2.45 0.445,2.38 0.445,2.38 0.445,1.595 0.955,1.595 1.025,1.576 1.076,1.525 1.095,1.455 1.095,1.455 1.095,-1.455 1.076,-1.525 1.025,-1.576 0.955,-1.595 0.955,-1.595 0.445,-1.595 0.445,-2.38 0.426,-2.45 0.375,-2.501 0.305,-2.52 0.305,-2.52 0.245,-2.52 0.175,-2.501 0.124,-2.45 0.105,-2.38 0.105,-2.38 0.105,-1.995 -0.105,-1.995 -0.105,-2.38 -0.124,-2.45 -0.175,-2.501 -0.245,-2.52 -0.245,-2.52 -0.305,-2.52 -0.375,-2.501 -0.426,-2.45 -0.445,-2.38 -0.445,-2.38 -0.445,-1.595 -0.955,-1.595 -1.025,-1.576 -1.076,-1.525 -1.095,-1.455 -1.095,-1.455
  silkscreen extent -1.8,-2.3 1.8,3.2, body extent -1.75,-2.25 1.75,2.25, height 1
FP-RLT0007A-MFG [mm]
  rect 0.6x0.25 smd paste-1000 mask-1000: 1(-0.9,0.75)
  rrect100% 0.6x0.25 smd paste-1000 mask-1000: 2(-0.9,0.25) 3(-0.9,-0.25) 4(-0.9,-0.75)
  rect 1.64x0.44 smd paste-1000 mask-1000: 5(0.45,-0.6) 6(0.45,0) 7(0.45,0.6)
  silkscreen extent -1.9,-1.3 1.05,1.3, body extent -1.3,-1.15 1.37,1.15, height 0.25
FP-RP732A-MFG [mm]
  rect 1x1.35 smd paste+0 mask+0: 1(-1,0) 2(1,0)
  silkscreen extent -0.13,-0.7 0.13,0.7, body extent -1.6,-0.8 1.6,0.8, height 0.25
FP-RWU0007A-MFG [mm]
  rrect29% 1.15x0.35 smd paste-1000 mask+0: 1(-0.625,0.55) 3(-0.625,-0.55)
  rrect50% 1.45x0.2 smd paste-1000 mask+0: 2(-0.475,0)
  rrect40% 0.45x0.25 smd paste+0 mask+0: 4(0.975,-0.75) 5(0.975,-0.25) 6(0.975,0.25) 7(0.975,0.75)
  silkscreen extent 0.33,-1.05 0.38,1.05, body extent -1.3,-1.15 1.3,1.15, height 0.25
FP-SMB-CA-MFG [mm]
  rect 1.62x2.18 smd paste+0 mask+0: 1(-2.11,0) 2(2.11,0)
  body extent -2.68,-1.81 2.68,1.81, height 2.65
FP-USB4110-GF-A-MFG [mm]
  rrect50% 0.6x1.15 smd paste+0 mask+0: A1/B12(-3.2,3.68) A4/B9(-2.4,3.68) B1/A12(3.2,3.68) B4/A9(2.4,3.68)
  rrect50% 0.3x1.15 smd paste+0 mask+0: A5(-1.25,3.68) A6(-0.25,3.68) A7(0.25,3.68) A8(1.25,3.68) B5(1.75,3.68) B6(0.75,3.68) B7(-0.75,3.68) B8(-1.75,3.68)
  round 0 hole 0.65 unplated paste-2539.97 mask+0.102: MH(-2.89,2.605) MH(2.89,2.605)
  rrect25% 2.18x2 smd paste+0: S1(-5.11,3.105) S2(5.11,3.105) S3(-5.11,-0.825) S4(5.11,-0.825)
  silkscreen extent -4.57,-3.82 4.57,4.99, body extent -5.65,-3.67 5.65,4.01, height 3.21
"FTSH-105-01-F-DV-007-K PLUGIN" [mil]
  rrect50% 29.13x109.84 smd: 1(-100,-80) 2(-100,80) 3(-50,-80) 4(-50,80) 5(0,-80) 6(0,80) 8(50,80) 9(100,-80) 10(100,80)
  silkscreen extent -143,-187 143,153, body extent -208,-310 207,115, height 315
"Keystone 5000 Series" [mm]
  round 1.55 hole 1.016: 1(0,0)
  silkscreen extent -1.27,-1.27 1.27,1.27, body extent -1.25,-1.24 1.25,1.24, height 4.62
KSTN-5011_V [mm] "Test Point, Dia 3.17mm"
  round 2.1 hole 1.6: 1(0,0)
  silkscreen extent -1.59,-1.58 1.59,1.58, body extent -1.58,-1.59 1.58,1.59, height 8.12
LED_0805 [mm] "Molded Diode, 2-Leads, Body 2.00x1.25mm, IPC Medium Density"
  rrect25% 1.01x1.47 smd: A(0.98,0) K(-0.98,0)
  silkscreen extent -1.88,-1.06 1.13,1.06, body extent -1,-0.62 1,0.62, height 1.12
LED_0805_BLUE [mm] "Molded Diode, 2-Leads, Body 2.00x1.25mm, IPC Medium Density"
  rrect25% 1.01x1.47 smd: A(0.98,0) K(-0.98,0)
  silkscreen extent -1.88,-1.06 1.13,1.06, body extent -1,-0.62 1,0.62, height 1.12
LED_0805_RED [mm] "Molded Diode, 2-Leads, Body 2.00x1.25mm, IPC Medium Density"
  rrect25% 1.01x1.47 smd: A(0.98,0) K(-0.98,0)
  silkscreen extent -1.88,-1.06 1.13,1.06, body extent -1,-0.62 1,0.62, height 1.12
LED_0805_WHITE [mm] "Molded Diode, 2-Leads, Body 2.00x1.25mm, IPC Medium Density"
  rrect25% 1.01x1.47 smd: A(0.98,0) K(-0.98,0)
  silkscreen extent -1.13,-1.06 1.13,1.06, body extent -1,-0.62 1,0.62, height 1.12
LED_0805_YELLOW [mm] "Molded Diode, 2-Leads, Body 2.00x1.25mm, IPC Medium Density"
  rrect25% 1.01x1.47 smd: A(0.98,0) K(-0.98,0)
  silkscreen extent -1.13,-1.06 1.13,1.06, body extent -1,-0.62 1,0.62, height 1.12
"MHDR 1X7-Footprint-1" [mil]
  rect 65x65 hole 40: 1(-300,0)
  round 65 hole 40: 2(-200,0) 3(-100,0) 4(0,0) 5(100,0) 6(200,0) 7(300,0)
  silkscreen extent -355,-54 355,53, body extent -350,-49 350,49, height 335
PH1-02-UA [mil]
  rect 65x65 hole 40: 1(-50,0)
  round 65 hole 40: 2(50,0)
  silkscreen extent -105,-54 105,53, body extent -100,-49 100,49, height 335
"PH1-03-UA WITH CONNECTOR" [mil]
  rect 65x65 hole 40: 1(-100,0)
  round 65 hole 40: 2(0,0) 3(100,0)
  silkscreen extent -155,-54 155,53, body extent -150,-50 150,50, height 945
PTS810SJK250SMTRLFS-Footprint-1 [mm]
  rrect25% 1.05x0.65 smd: 1(-2.075,1.075) 2(2.075,1.075) 3(-2.075,-1.075) 4(2.075,-1.075)
  silkscreen extent -2.29,-0.38 2.29,0.38, body extent -2.29,-1.6 2.29,1.6, height 2.5
RESC1608X55X25LL10T15 [mm] "Chip Resistor, 2-Leads, Body 1.70x0.90mm, IPC High Density"
  rect 0.6x0.8 smd: 1(-0.65,0) 2(0.65,0)
  body extent -0.85,-0.45 0.85,0.45, height 0.55
RESC1609X50X30NL10T20 [mm] "Chip Resistor, 2-Leads, Body 1.55x0.85mm, IPC Medium Density"
  rect 0.8x0.95 smd: 1(-0.625,0) 2(0.625,0)
  body extent -0.82,-0.48 0.82,0.48, height 0.5
RESC2013X70X40NL20T20 [mm] "Chip Resistor, 2-Leads, Body 2.00x1.25mm, IPC Medium Density"
  rect 1.15x1.45 smd: 1(-0.875,0) 2(0.875,0)
  body extent -1.1,-0.72 1.1,0.72, height 0.7
"SMT Testpoint, 50mil"#1 [mil]
  round 50 smd: 1(0,0)
  silkscreen extent -40,-40 40,40
"SMT Testpoint, 50mil"#2 [mil]
  round 50 smd paste+0: 1(0,0)
  silkscreen extent -40,-40 40,40
SON180P1700X265-20N [mm] "SON, 20-Leads, Body 18.00x17.00mm, Pitch 1.80mm, IPC Medium Density"
  rect 2x1.05 smd: 1(-8.255,7.945) 2(-8.255,6.145) 3(-8.255,4.345) 4(-8.255,2.545) 5(-8.255,0.745) 6(-8.255,-1.055) 7(-8.255,-2.855) 8(-8.255,-4.655) 9(-8.255,-6.455) 10(-8.255,-8.255) 11(8.255,-8.199) 12(8.255,-6.399) 13(8.255,-4.599) 14(8.255,-2.799) 15(8.255,-0.999) 16(8.255,0.801) 17(8.255,2.601) 18(8.255,4.401) 19(8.255,6.201) 20(8.255,8.001)
  silkscreen extent -8.99,-9.25 8.75,10.03, body extent -8.6,-9.1 8.6,9.1, height 2.65
SOT-363-6-ST [mm]
  rrect25% 1.05x0.4 smd paste+0 mask+0: 1(-0.925,0.65) 2(-0.925,0) 3(-0.925,-0.65) 4(0.925,-0.65) 5(0.925,0) 6(0.925,0.65)
  silkscreen extent -2.22,-1.1 0.7,1.1, body extent -1.05,-1 1.05,1, height 1.1
"Test PTH 15-30" [mil]
  round 30 hole 15 paste-99999: 1(0,0)
  silkscreen extent -28,-28 28,28
Testpad-HeaderPin [mil]
  round 64 hole 40: 1(0,0)
  silkscreen extent -45,-45 45,45, body extent -50,-49 50,49, height 335
WE-HCI_7040 [mm] "SMT Flat Wire High Current Inductor, body 6.9x6.9mm"
  rrect25% 2.2x2.7 smd: 1(0,2.55) 2(0,-2.55)
  silkscreen extent -3.6,-3.6 3.6,3.6, body extent -3.45,-3.5 3.45,3.5, height 4
WE-LHMI_5030 [mm] "SMT Power Inductor, 2-Leads, body 5.2x5.2mm"
  rrect25% 2x1.8 smd: 1(-2.25,0) 2(2.25,0)
  L1 keep-out region: -1.016,2.286 1.016,2.286 1.016,-2.286 -1.016,-2.286
  L1 keep-out region: -1.15,2.6 1.15,2.6 1.15,-2.6 -1.15,-2.6
  silkscreen extent -2.7,-2.75 2.7,2.75, body extent -2.85,-2.6 2.85,2.6, height 2.8

## Part data
C1 C7 C9: library part CMP-001-00021-2, "Capacitor Surface Mount 0805 Footprint 4.7UF 50V 10% Tolerance Ceramic X5R", Capacitor Type=Ceramic, Case/Package=0805, Tolerance=10%, Voltage=50V, Description in Visual="Cap SMT 0805 4.7UF 35V 10%  Cer X5R", Mount=SMT, P/N="CAP 0805 4.7UF 35V 10% X5R", PCB Package=0805, Pins=2, RoHS=Yes, Type="Ceramic X5R"
C2: library part CMP-011-000188-2, "Capacitor Surface Mount 0603 Footprint 0.01UF 50V 10% Tolerance Ceramic X7R", JLCPCB Part #=C57112, Manufacturer=Various, PCB Package=0603, Tolerance=10%, Voltage=50V, Description in Visual="Cap SMT 0603 0.01UF 50V 10%  Cer X7R", Manufacturer P/N="CAP 0603 0.01UF 50V 10% X7R", Mount=SMT, P/N="CAP 0603 0.01UF 50V 10% X7R", Type="Ceramic X7R"
C3: library part CMP-011-000522-1, "Capacitor Surface Mount 0805 Footprint 4.7UF 10V 10% Tolerance Ceramic X7R", Manufacturer=Various, PCB Package=0805, Tolerance=10%, Voltage=10V, Description in Visual="Cap SMT 0805 4.7UF 10V 10%  Cer X7R", Manufacturer P/N="CAP 0805 4.7UF 10V 10% X7R", Mount=SMT, P/N="CAP 0805 4.7UF 10V 10% X7R", Type="Ceramic X7R"
C4 C5 C6 C32: library part CMP-011-000223-3, "Capacitor Surface Mount 0603 Footprint 0.1UF 50V 10% Tolerance Ceramic X7R 100nF", Capacitor Type=Ceramic, Case/Package=0603, JLCPCB Part #=C14663, Manufacturer=Various, Tolerance=10%, Voltage=50V, Description in Visual="Cap SMT 0603 0.1UF 50V 10%  Cer X7R", Manufacturer P/N="CAP 0603 0.1UF 50V 10% X7R", Mount=SMT, P/N="CAP 0603 0.1UF 50V 10% X7R", PCB Package=0603, RoHS=Yes, Type="Ceramic X7R"
C8 C11 C12 C28 C30 C34: library part CMP-011-000287-2, "Capacitor Surface Mount 0603 Footprint 1UF 50V 10% Tolerance Ceramic X7R", Capacitor Type=Ceramic, Case/Package=0603, Manufacturer=Various, Tolerance=10%, Voltage=50V, Description in Visual="Cap SMT 0603 1UF 50V 10% Ceramic X7R", Manufacturer P/N="CAP 0603 1UF 50V 10% X7R", Mount=SMT, P/N="CAP 0603 1UF 50V 10% X7R", PCB Package=0603, RoHS=Yes, Type="Ceramic X7R"
C10 C13: library part CMP-001-00003-5, "Capacitor Surface Mount 1206 Footprint 10UF 25V 10% Tolerance Ceramic X5R", Capacitor Type=Ceramic, Case/Package=1206, JLCPCB Part #=C13585, Manufacturer=Various, Tolerance=10%, Voltage=50V, Description in Visual="Cap SMT 1206 10UF 50V 10%  Cer X5R", Manufacturer P/N="CAP 1206 10UF 50V 10% X5R", Mount=SMT, P/N="CAP 1206 10UF 50V 10% X5R", PCB Package=1206, RoHS=Yes, Type="Ceramic X5R"
C14 C15: library part CMP-011-000283-1, "Capacitor Surface Mount 0603 Footprint 18PF 50V 5% Tolerance Ceramic C0G", Manufacturer=Various, PCB Package=0603, Tolerance=5%, Voltage=50V, Description in Visual="Cap SMT 0603 18PF 50V 5%  Cer C0G", Manufacturer P/N="CAP 0603 18PF 50V 5% C0G", Mount=SMT, P/N="CAP 0603 18PF 50V 5% C0G", Type="Ceramic C0G"
C16: library part CMP-011-000263-1, "Capacitor Surface Mount 0603 Footprint 10UF 16V 20% Tolerance Ceramic X5R", Manufacturer=Various, PCB Package=0603, Tolerance=20%, Description in Visual="Cap SMT 0603 10UF 16V 20% Ceramic X5R", Manufacturer P/N="CAP 0603 10UF 16V 20% X5R", Mount=SMT, P/N="CAP 0603 10UF 16V 20% X5R", Type="Ceramic X5R"
C17 C24 C25: library part CMP-2007-01008-2, "CAP CER 47UF 6.3V X5R 0805", Case Code (Imperial)=0805, Case Code (Metric)=2012, Dielectric=X5R, Dielectric Material=Ceramic, Max Operating Temperature=85°C, Min Operating Temperature=-55°C, Package Quantity=3000, Tolerance=20%, Voltage=6.3V, Capacitance=47uF, Case/Package=0805, Construction=Flat, Depth=1.25mm, Dissipation Factor=5%, Height=1.25mm, Length=2mm, Mount=PCB, Number of Pins=2, Packaging="Tape and Reel", Radiation Hardening=No, REACH SVHC="No SVHC", RoHS Compliant=Yes, Series=C0805C, Termination=SMD/SMT, Voltage Rating=6.3V, Voltage Rating (DC)=6.3V, Width=1.2mm
C18 C35 C37: library part CMP-2000-05002-2, "CAP CER 0.1UF 16V X7R 0603", Capacitance="100 nF", Manufacturer=YAGEO, Manufacturer Part Number=CC0603KRX7R7BB104, Package=CC0603-DA, Temperature="-55°C to +125°C", Temperature Characteristic=X7R, Temperature Coefficient=15%, Temperature Range High=+125°C, Temperature Range Low=-55°C, Tolerance=0.1, Voltage="16 V", Automotive=No, Category=Cap, ComponentLink2Description=Datasheet, ComponentLink2URL=http://www.yageo.com/documents/recent/UPY-GPHC_X7R_6.3V-to-50V_18.pdf, Device Class L1="Passive Components", Device Class L2=Capacitors, Device Class L3="Ceramic Capacitors", Digikey Description="CAP CER 0.1UF 16V X7R 0603", Footprint Url=http://www.yageo.com/exep/pages/download/literatures/UPY-C_GEN_24.pdf, Height=0.9mm, Lead Free=Yes, Material=Ceramic, Mouser Description="Multilayer Ceramic Capacitor, CC Series, 0.1 - F, - 10%, X7R, 16 V, 0603 [1608 Metric]", Octopart=https://octopart.com/cc0603krx7r7bb104-yageo-192941, RoHS=TRUE, Voltage Rating="16 V"
C19: library part CMP-2000-07546-2, "Cap Ceramic 100nF 50V X7R 10% Pad SMD 0603 +125°C Automotive T/R", Case Code (Imperial)=0603, Case Code (Metric)=1608, Dielectric=X7R, Max Operating Temperature=125°C, Min Operating Temperature=-55°C, Package Quantity=1, Ratings=AEC-Q200, Tolerance=10%, Voltage=50V, Capacitance=100nF, Case/Package=0603, Composition=Ceramic, Depth=0.8mm, Height=0.8mm, Lead Free="Lead Free", Length=1.6mm, Mount="Surface Mount", Packaging="Tape and Reel", Radiation Hardening=No, REACH SVHC="No SVHC", Termination=SMD/SMT, Thickness=0.035inch, Voltage Rating=50V, Voltage Rating (DC)=50V, Weight=7.1E-05oz, Width=0.8mm
C20: library part CMP-2006-03713-1, Manufacturer=Kemet, Part Number=C0603C105K3RACTU
C21: library part CMP-2007-03316-2, "CAP CER 8200PF 200V C0G/NP0 0805", Capacitance="8,200 pF", Manufacturer=KEMET, Manufacturer Part Number=C0805C822J2GACAUTO, Package=C0805C-DN, Temperature="-55°C to +125°C", Temperature Characteristic=C0G, Temperature Coefficient=30ppm/°C, Temperature Range High=+125°C, Temperature Range Low=-55°C, Tolerance=0.05, Voltage Rating="200 V", Automotive=No, Category=Cap, ComponentLink2Description=Datasheet, ComponentLink2URL=https://content.kemet.com/datasheets/KEM_C1003_C0G_SMD.pdf, Device Class L1="Passive Components", Device Class L2=Capacitors, Device Class L3="Ceramic Capacitors", Digikey Description="CAP CER 8200PF 200V C0G/NP0 0805", Height=0.88mm, Ipc Land Pattern Name=CAPC200125X78, Lead Free=Yes, Material=Ceramic, Octopart=https://octopart.com/c0805c822j2gacauto-kemet-46733249, RoHS=TRUE
C22: library part CMP-1035-01031-3, "CAP CER 43PF 50V 5% NP0 0603", Capacitance="43 pF", Manufacturer=KEMET, Manufacturer Part Number=C0603C430J5GACTU, Package=C0603C-CF, Temperature="-55°C to +125°C", Temperature Characteristic=C0G, Temperature Coefficient=30ppm/°C, Temperature Range High=+125°C, Temperature Range Low=-55°C, Tolerance=0.05, Voltage Rating="50 V", Automotive=Yes, Automotive Grade="Grade 1", Category=Cap, ComponentLink2Description=Datasheet, ComponentLink2URL=https://api.kemet.com/component-edge/download/datasheet/C0603C100J5GACAUTO.pdf, Device Class L1="Passive Components", Device Class L2=Capacitors, Device Class L3="Ceramic Capacitors", Digikey Description="CAP CER 43PF 50V 5% NP0 0603", Height=0.87mm, Lead Free=Yes, Material=Ceramic, Mouser Description="Multilayer Ceramic Capacitor, C Series, 43 Pf, - 5%, C0g / Np0, 50 V, 0603 [1608 Metric] Rohs Compliant: Yes", Octopart=https://octopart.com/c0603c430j5gactu-kemet-9138600, RoHS=TRUE
C23: library part CMP-2006-04378-2, "General Purpose Ceramic Capacitor, 0603, 1nF, 10%, X7R, 15%, 50V", Case Code (Imperial)=0603, Case Code (Metric)=1608, Dielectric=X7R, Dielectric Material=Ceramic, Max Operating Temperature=125°C, Min Operating Temperature=-55°C, Package Quantity=4000, Tolerance=10%, Voltage=50V, Capacitance=1nF, Case/Package=0603, Construction=Flat, Contact Plating=Tin, Depth=0.81mm, Height=0.9mm, Lead Free="Lead Free", Length=1.6mm, Mount="Surface Mount", Number of Pins=2, Packaging="Tape and Reel", Radiation Hardening=No, REACH SVHC="No SVHC", RoHS Compliant=Yes, Series=-, Termination=SMD/SMT, Thickness=0.035inch, Voltage Rating=50V, Voltage Rating (DC)=50V, Weight=7.1E-05oz, Width=0.032inch
C26 C29: library part CMP-011-000263-1, "Capacitor Surface Mount 0603 Footprint 10UF 16V 20% Tolerance Ceramic X5R", Manufacturer=Various, PCB Package=0603, Tolerance=20%, Voltage=16V, Description in Visual="Cap SMT 0603 10UF 16V 20% Ceramic X5R", Manufacturer P/N="CAP 0603 10UF 16V 20% X5R", Mount=SMT, P/N="CAP 0603 10UF 16V 20% X5R", Type="Ceramic X5R"
C27 C31 C33: library part CMP-011-000507-1, "Capacitor Surface Mount 0805 Footprint 22UF 10V 20% Tolerance Ceramic X5R", Manufacturer=Various, PCB Package=0805, Tolerance=20%, Voltage=10V, Description in Visual="Cap SMT 0805 22UF 10V 20%  Cer X5R", Manufacturer P/N="CAP 0805 22UF 10V 20% X5R", Mount=SMT, P/N="CAP 0805 22UF 10V 20% X5R", Type="Ceramic X5R"
C36 C38: library part CMP-05427-002079-1, "Aluminum Electrolytic Capacitors (Radial Lead Type) 100uF ±20% 50V", Case/Package=Radial, ESR (Equivalent Series Resistance)=61mR, Max Operating Temperature=105°C, Min Operating Temperature=-40°C, Package Quantity=200, Ripple Current=870mA, Tolerance=20%, Voltage=50V, Capacitance=100uF, Construction=RADIAL, Contact Plating=Tin, Diameter=8mm, Height=11.5mm, Height - Seated (Max)=0.512inch, Impedance=61mR, Lead Diameter=0.6mm, Lead Pitch=3.5mm, Lead/Base Style=Straight, Length=11.5mm, Life (Hours)=6000Hour, Mount="Through Hole", Number of Pins=2, Packaging=Bulk, Radiation Hardening=No, REACH SVHC="No SVHC", Ripple Current (AC)=870mA, RoHS Compliant=Yes, Series=FR, Termination=Radial, Voltage Rating=50V, Voltage Rating (DC)=50V
D1 D2: library part CMP-00026-00001-2, "Single Color LED, RED, 0805", Color=Red, Current=20mA, Forward Voltage=2V, RoHS Compliant=Yes, Test Current=20mA, Wavelength - Dominant=625nm, Wavelength - Peak=625nm
D3 D6 D12: library part CMP-00038-4, "Single Color LED, Green, 0805", Color=Green, Current=20mA, Forward Voltage=2V, Package (Case)=0805, RoHS Compliant=Yes, Test Current=20mA, Wavelength - Dominant=571nm, Wavelength - Peak=571nm
D13: library part CMP-12225-000020-1, "TVS DIODE 5V 13.4V SMB", Breakdown Voltage=6.4V, Clamping Voltage=9.2V, Manufacturer=STMicroelectronics, Max Junction Temp=+150°C, Package=SMB-CA, Peak Pulse Current=68A, Peak Pulse Power=600W, Reverse Standoff Voltage=5V, Temperature="-55°C to +150°C", Temperature Range Low=-55°C, Automotive=No, Category=Diode, ComponentLink2Description=Datasheet, ComponentLink2URL=https://www.st.com/content/ccc/resource/technical/document/datasheet/19/78/91/39/07/cd/40/65/CD00001366.pdf/files/CD00001366.pdf/_jcr_content/translations/en.CD00001366.pdf, Device Class L1="Circuit Protection", Device Class L2="TVS Diodes", Device Class L3=unset, Digikey Description="TVS DIODE 5V 13.4V SMB", Direction=Bidirectional, Height=2.65mm, Lead Free=Yes, Manufacturer Part Number=SMBJ5.0CA-TR, Mouser Description="TVS Diodes - Transient Voltage Suppressors 600W 5.0V Bidirect", Number Of Channels=1, Octopart=https://octopart.com/smbj5.0ca-tr-stmicroelectronics-347080, RoHS=TRUE, Standoff Height=0.05mm, Temperature Range High=+150°C
D14: library part CMP-00535-1, "LED Uni-Color Blue 469nm Automotive 2-Pin Chip 0805(2012Metric) T/R", Color=White, Current=20mA, Forward Voltage=3V, Millicandela Rating=280m, Package (Case)=0805, RoHS Compliant=Yes, Test Current=20mA
D15: library part CMP-00457-1, "LED Uni-Color Blue 469nm Automotive 2-Pin Chip 0805(2012Metric) T/R", Color=Bllue, Current=20mA, Forward Voltage=3V, Package (Case)=0805, RoHS Compliant=Yes, Test Current=20mA, Wavelength - Dominant=469nm, Wavelength - Peak=469nm
D16: library part CMP-031-000001-1, "LED Uni-Color Yellow 590nm Automotive 2-Pin Chip 0805(2012Metric) T/R", Color=Yellow, Current=20mA, Forward Voltage=2V, RoHS Compliant=Yes, Test Current=20mA
DN1: library part CMP-00096-2, "Trans Voltage Suppressor Diode, 5V V(RWM), Bidirectional, 7 Element, Silicon with EMI Filter", Filter Type="DATA LINE FILTER", Reach SVHC Compliant=Yes, RoHS Compliant=Yes
F1 F2: library part CMP-07400-000036-1, "PTC RESET FUSE 13.2V 500MA 1206", Ambient Temperature Range High=+85°C, Ambient Temperature Range Low=-40°C, Current Rating=100A, Hold Current=0.5A, Manufacturer=Bourns, Resistance=0.15-0.7Ω, Temperature="-40°C to +85°C", Trip Current=1A, Voltage Rating=13.2V, Automotive=Yes, Automotive Grade="Grade 3", Category=Fuse, ComponentLink2Description=Datasheet, ComponentLink2URL=https://www.bourns.com/docs/product-datasheets/mfnsmf.pdf?sfvrsn=39c76af6_14, Device Class L1="Circuit Protection", Device Class L2="PTC Resettable Fuses", Device Class L3=unset, Digikey Description="PTC RESET FUSE 13.2V 500MA 1206", Height=0.85mm, Lead Free=Yes, Manufacturer Part Number=MF-NSMF050-2, Mouser Description="Resettable Fuses - PPTC 0.50A 13.2V 0.15ohm 1206 Footprint", Octopart=https://octopart.com/mf-nsmf050-2-bourns-34532, Package=MF-NSMF050-2, RoHS=TRUE, Temperature Range High=+85°C, Temperature Range Low=-40°C, Trip Time=0.1s
FB1: library part CMP-00563-1, "600 Ohms @ 100 MHz 1 Power Line Ferrite Bead 0805 (2012 Metric) 2A 100mOhm"